# Altium PCB adio.PCBDOC (part 1 of 3)
Units mil, origin at the board's own origin, x right, y up, seen from the top; angles counter-clockwise.
Board outline 7750 x 4500 mil, 6 copper layers (Top Layer, Internal Plane 1, Mid-Layer 1, Mid-Layer 2, Internal Plane 2, Bottom Layer); 163 components, 231 nets, 1195 pads, 503 vias.
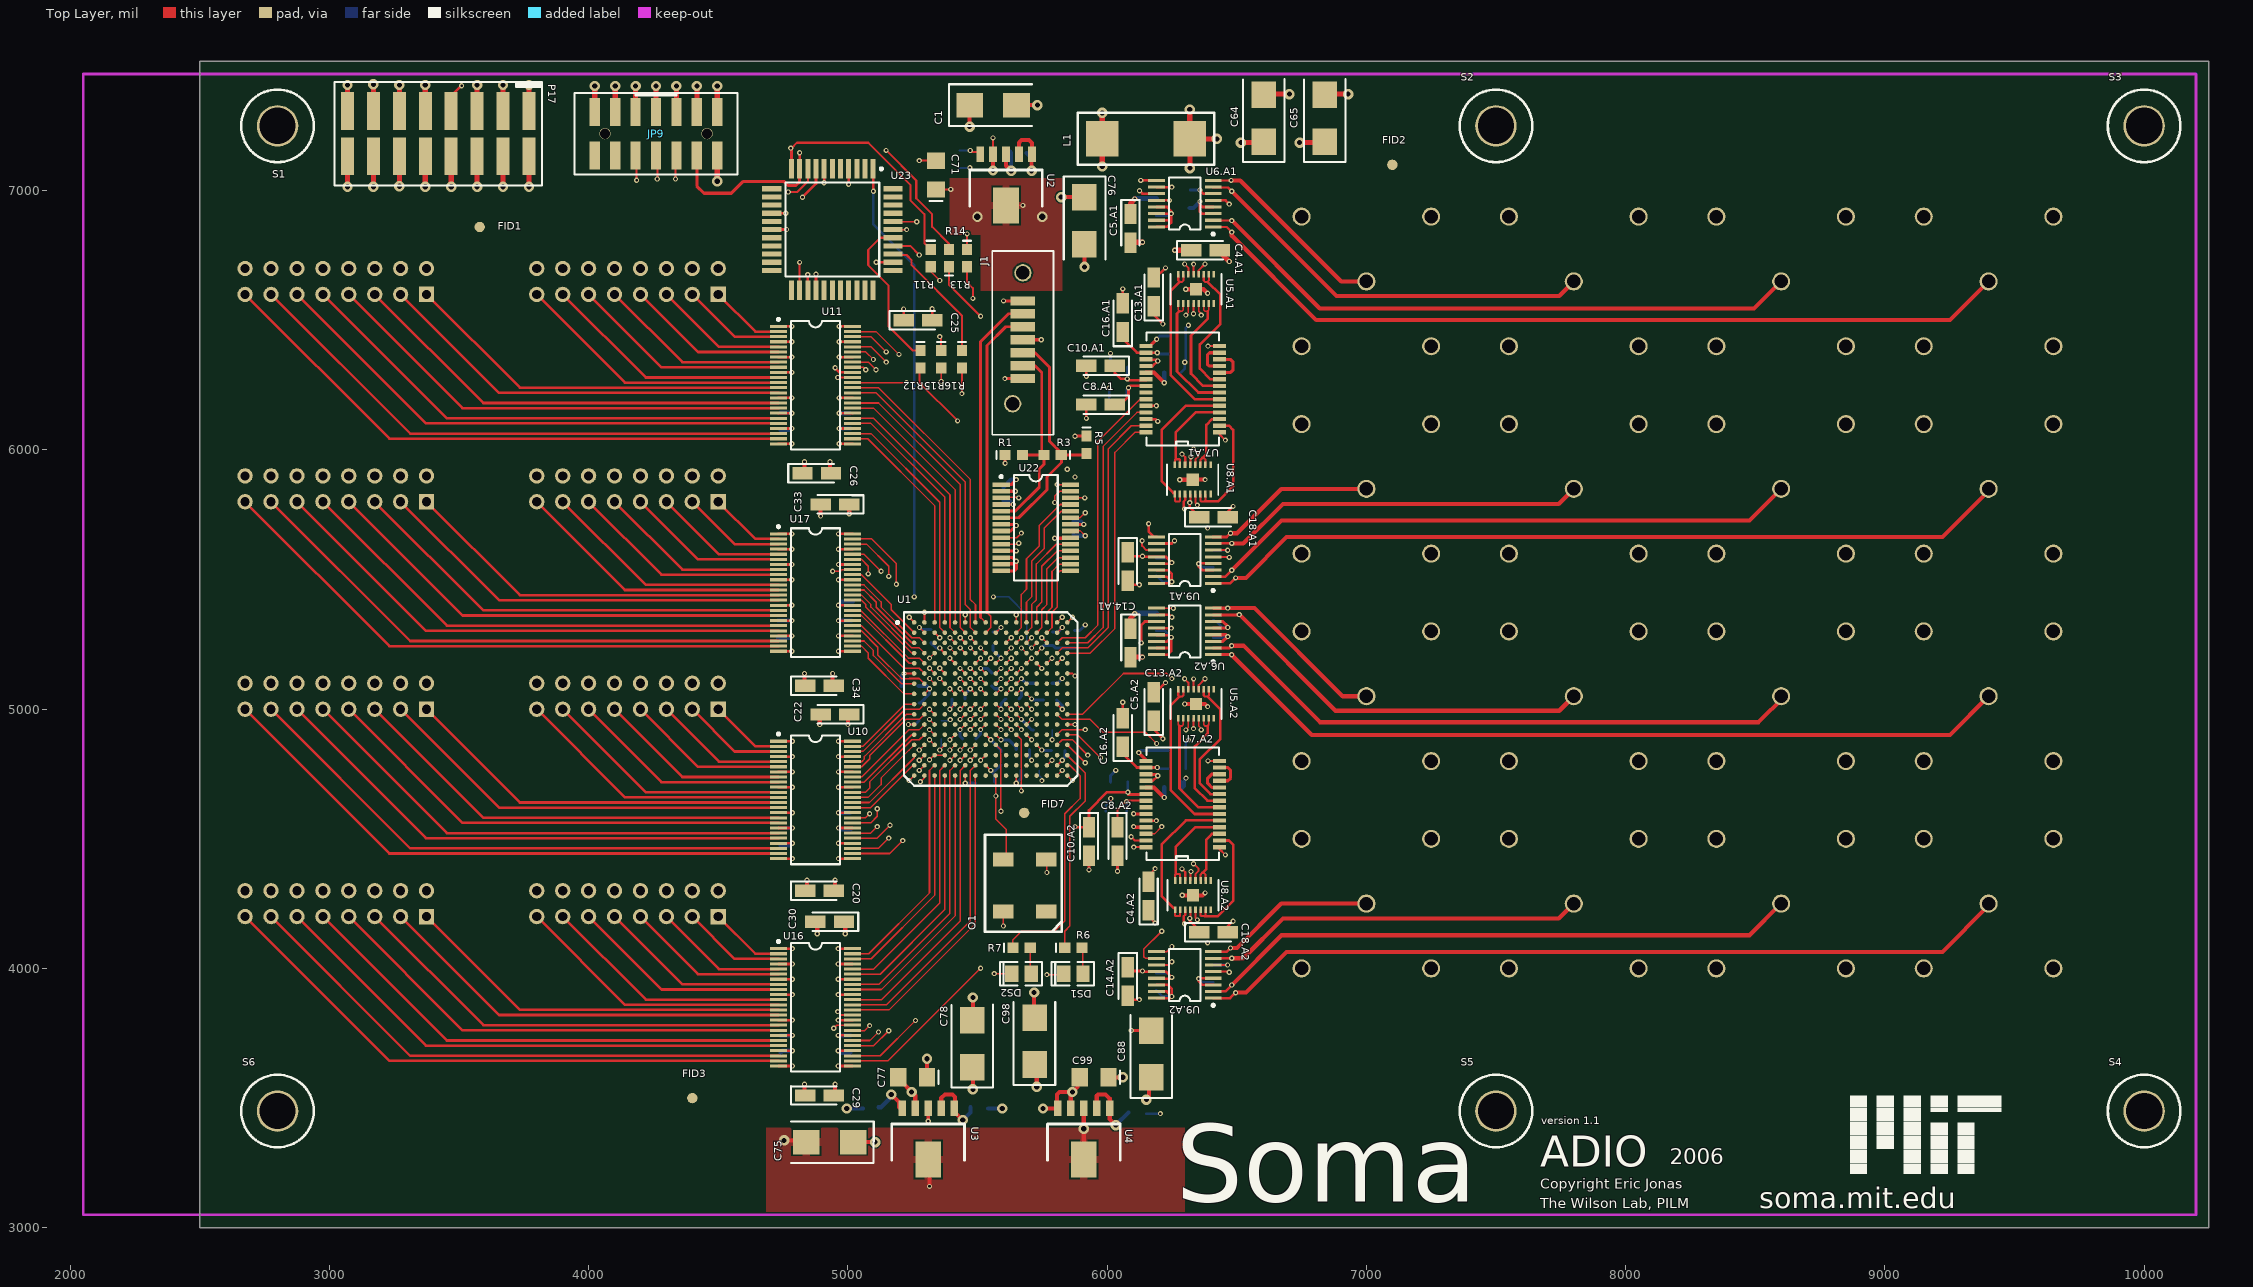
[diagram p0: Top Layer view]
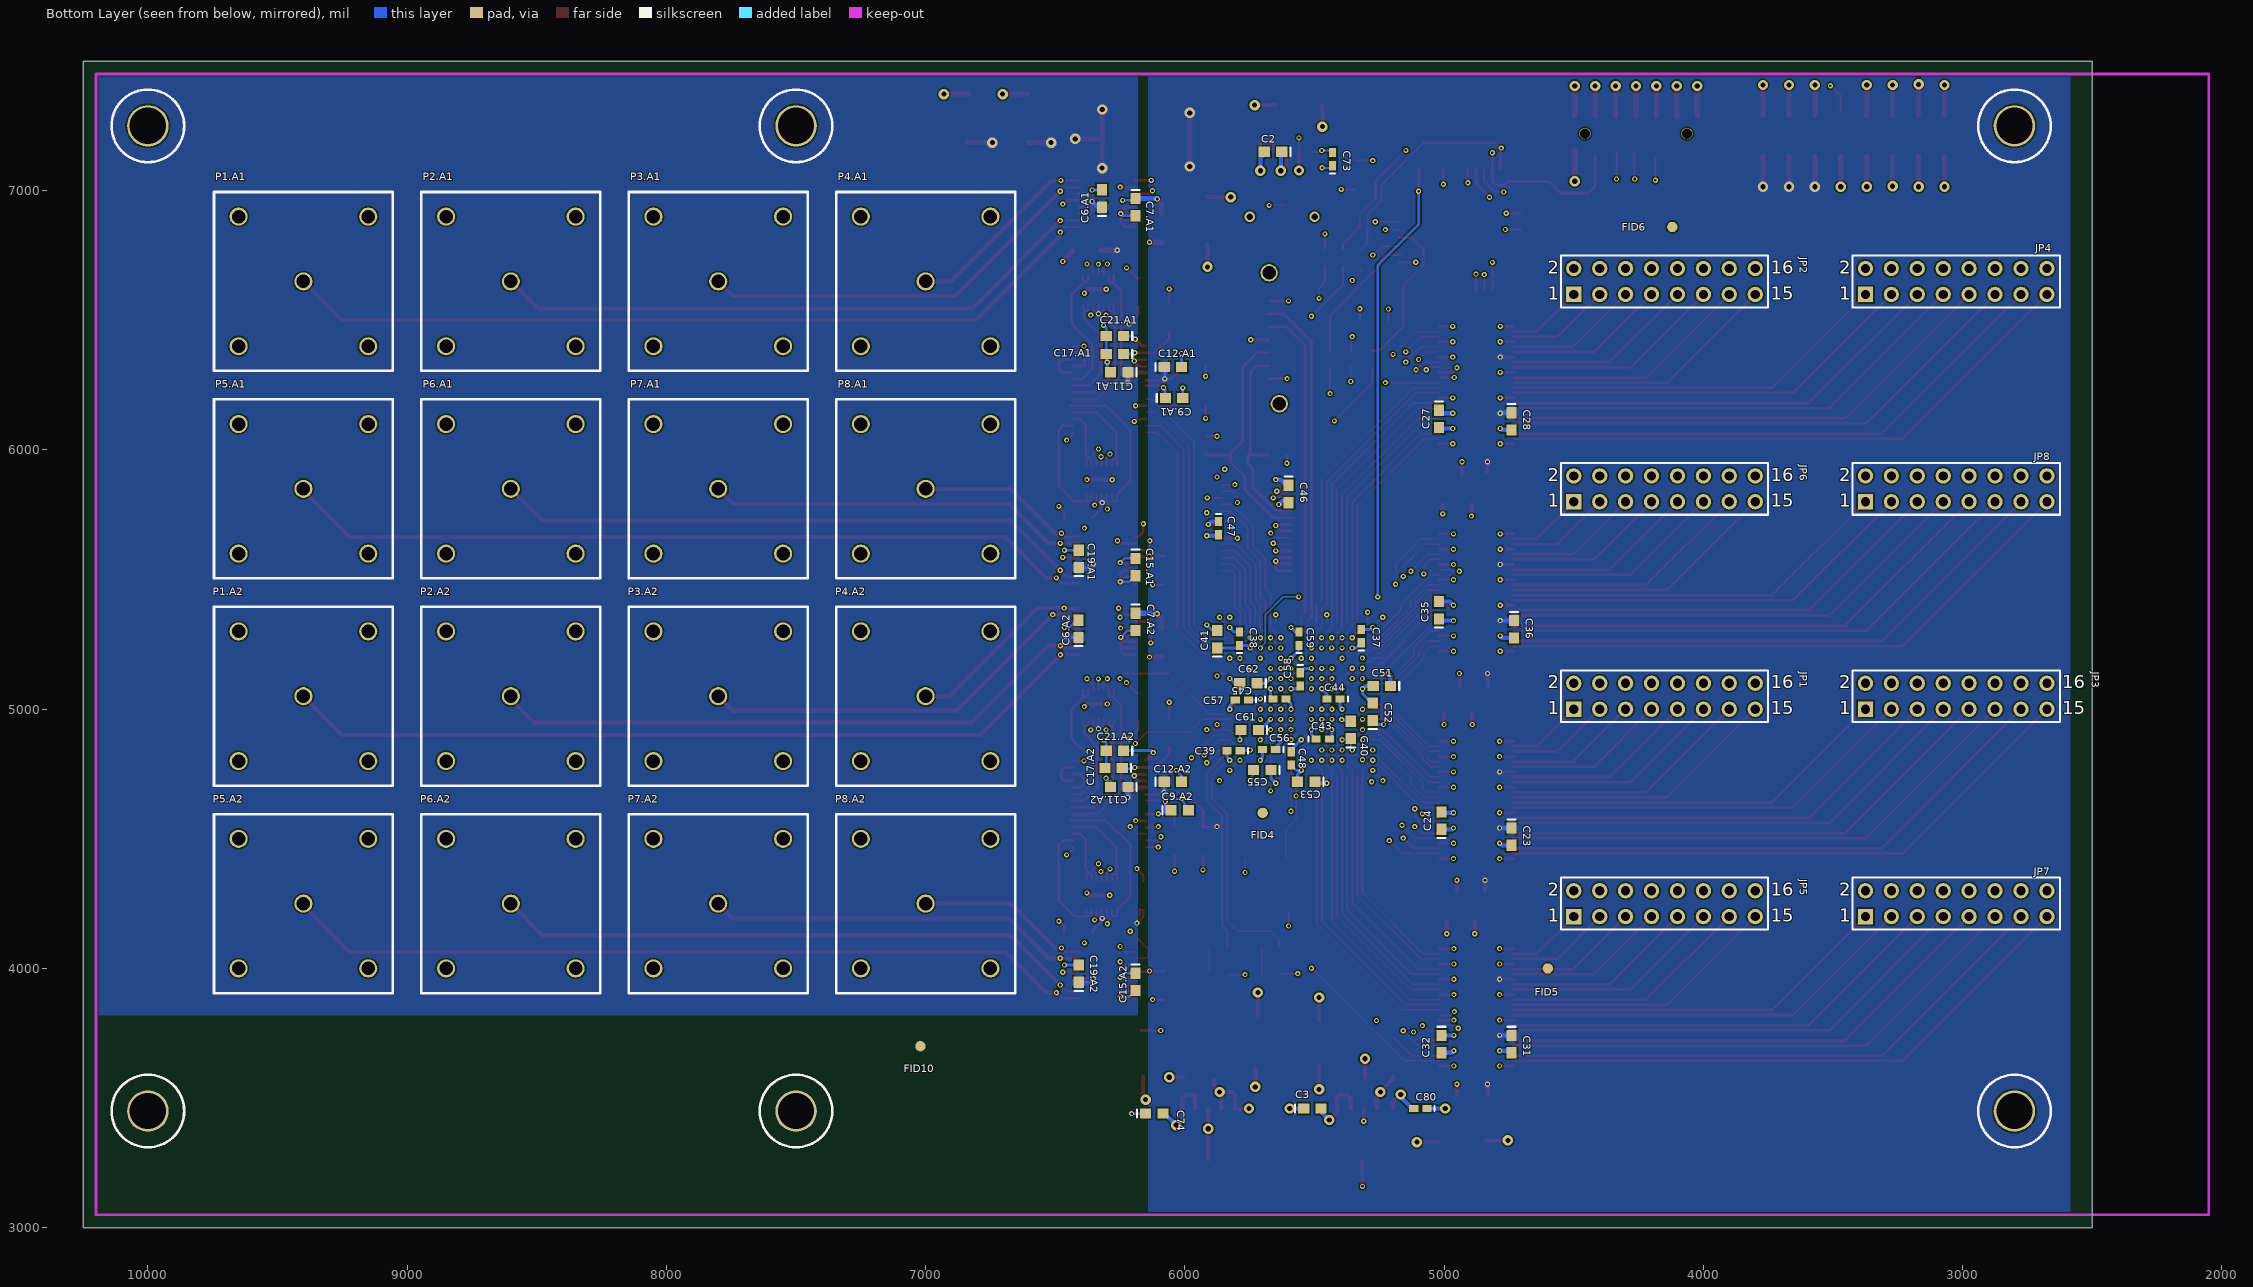
[diagram p1: Bottom Layer view, seen from below]
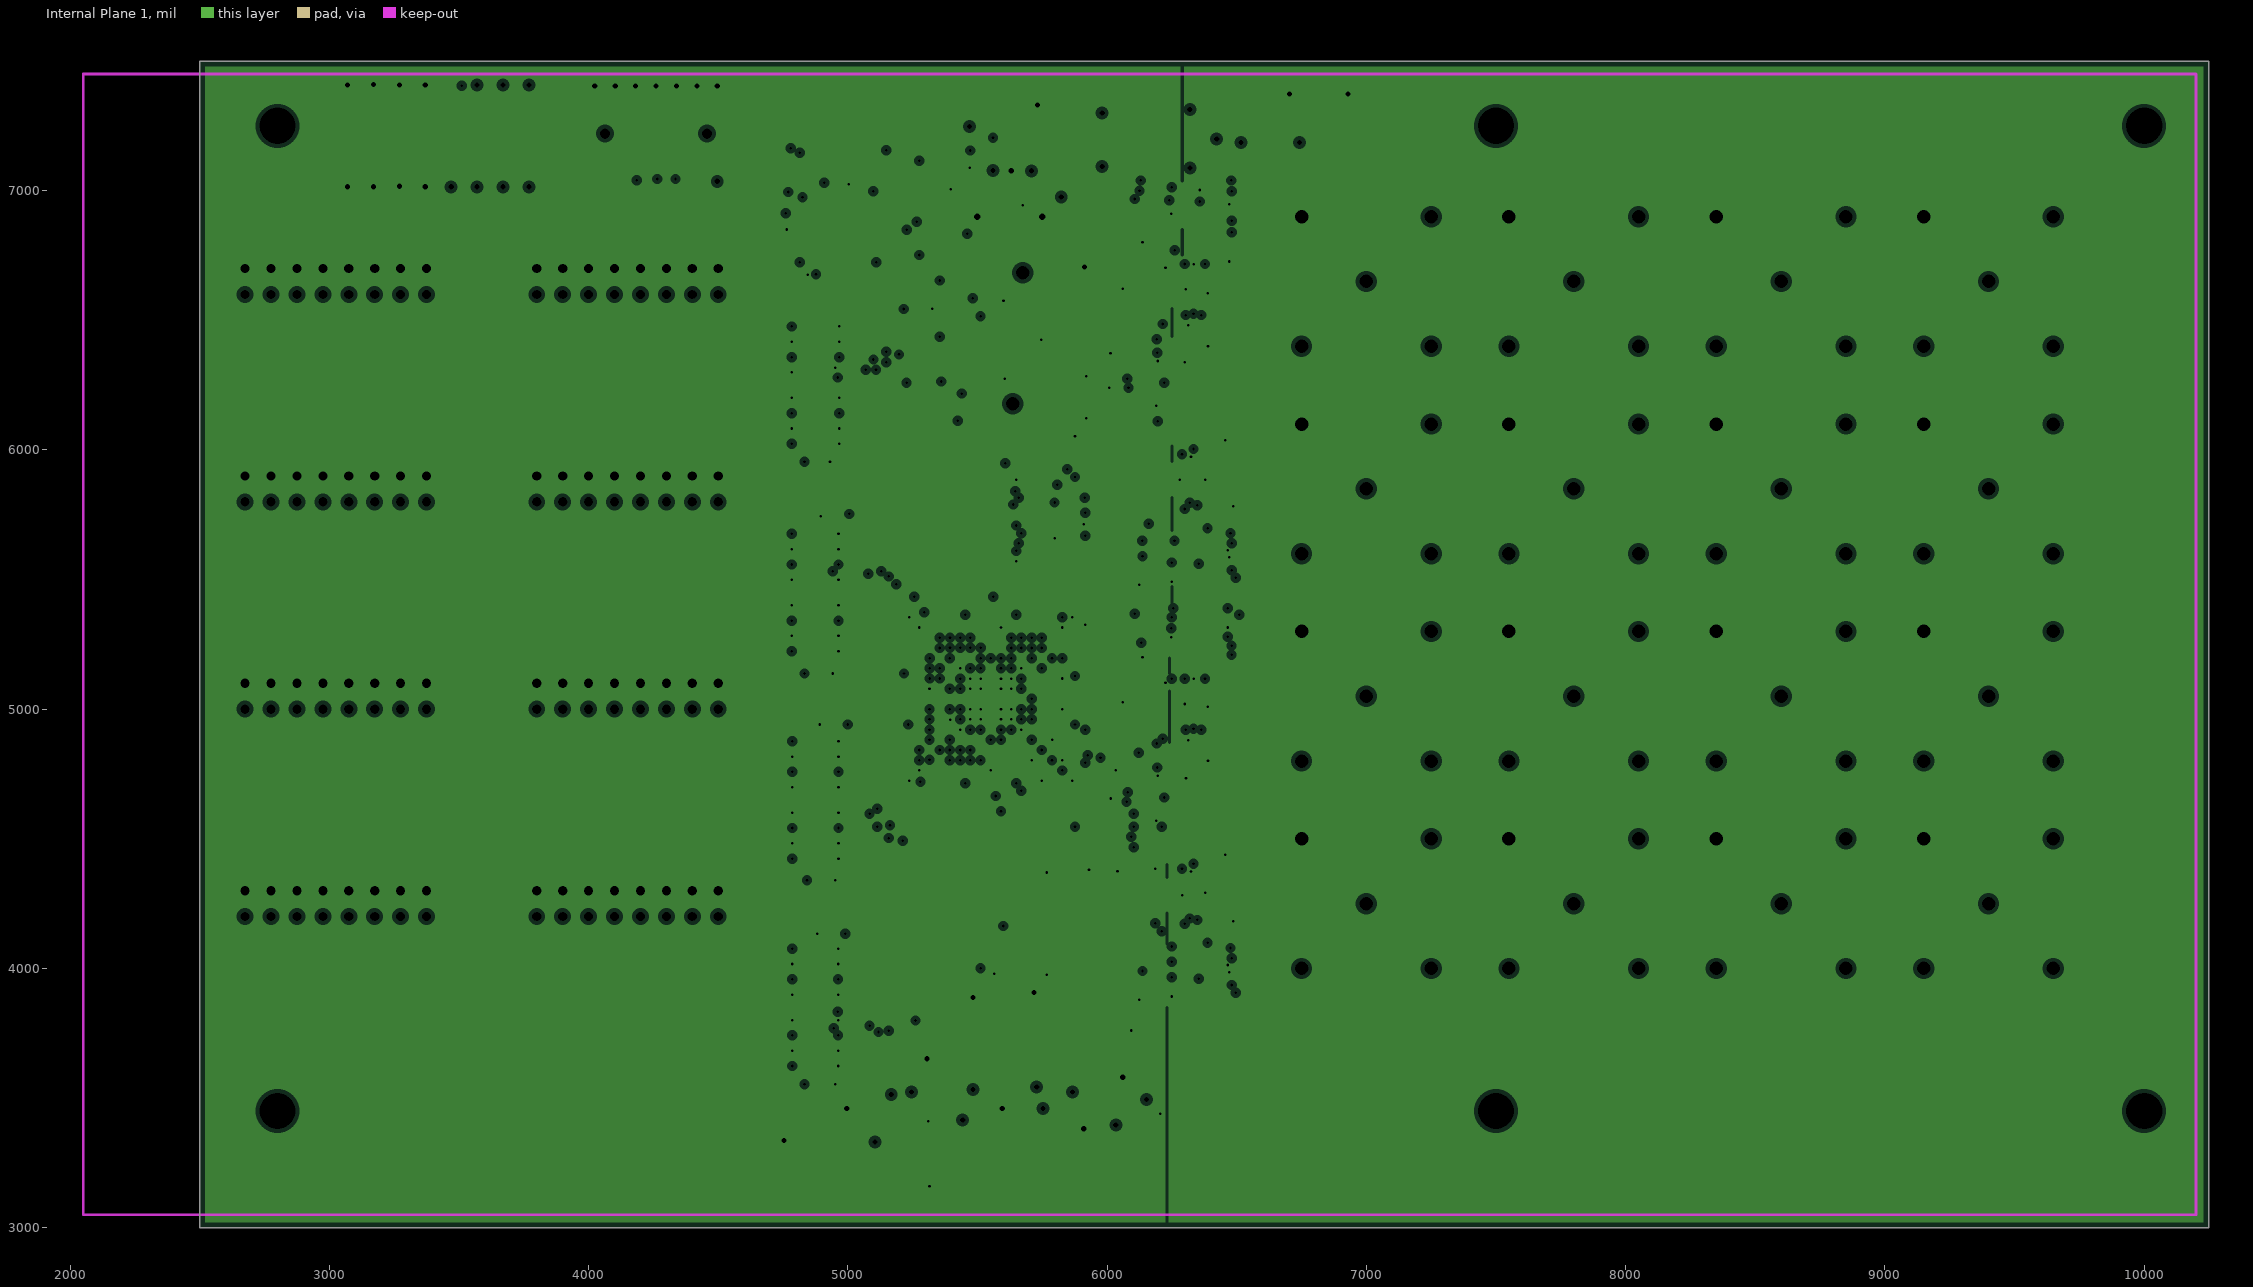
[diagram p2: Internal Plane 1, clearances drawn from the general rule]
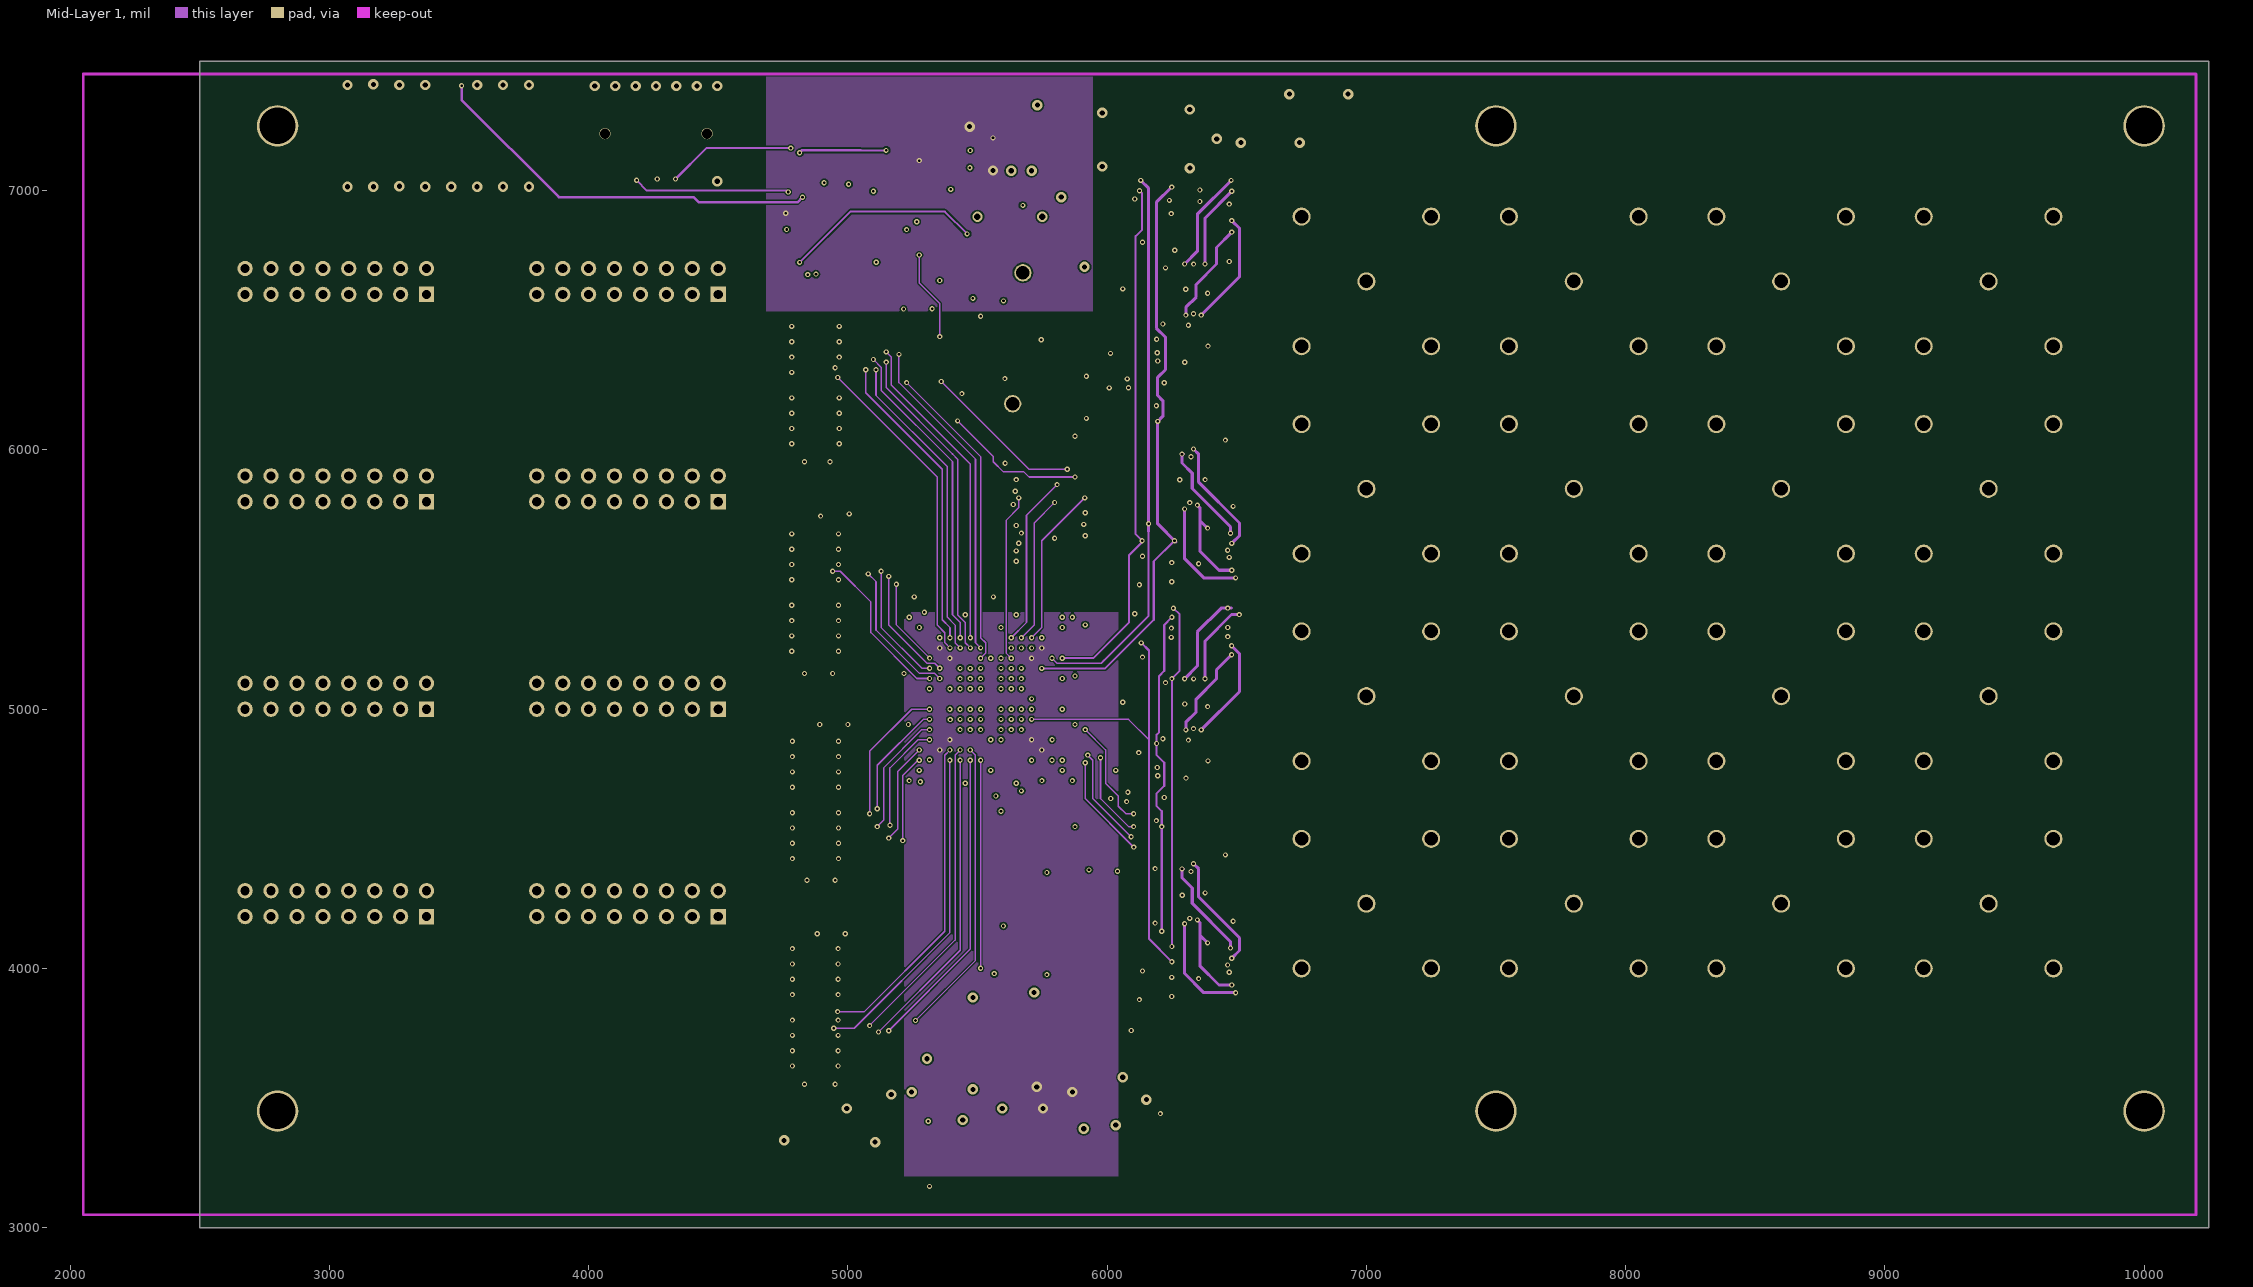
[diagram p3: Mid-Layer 1]
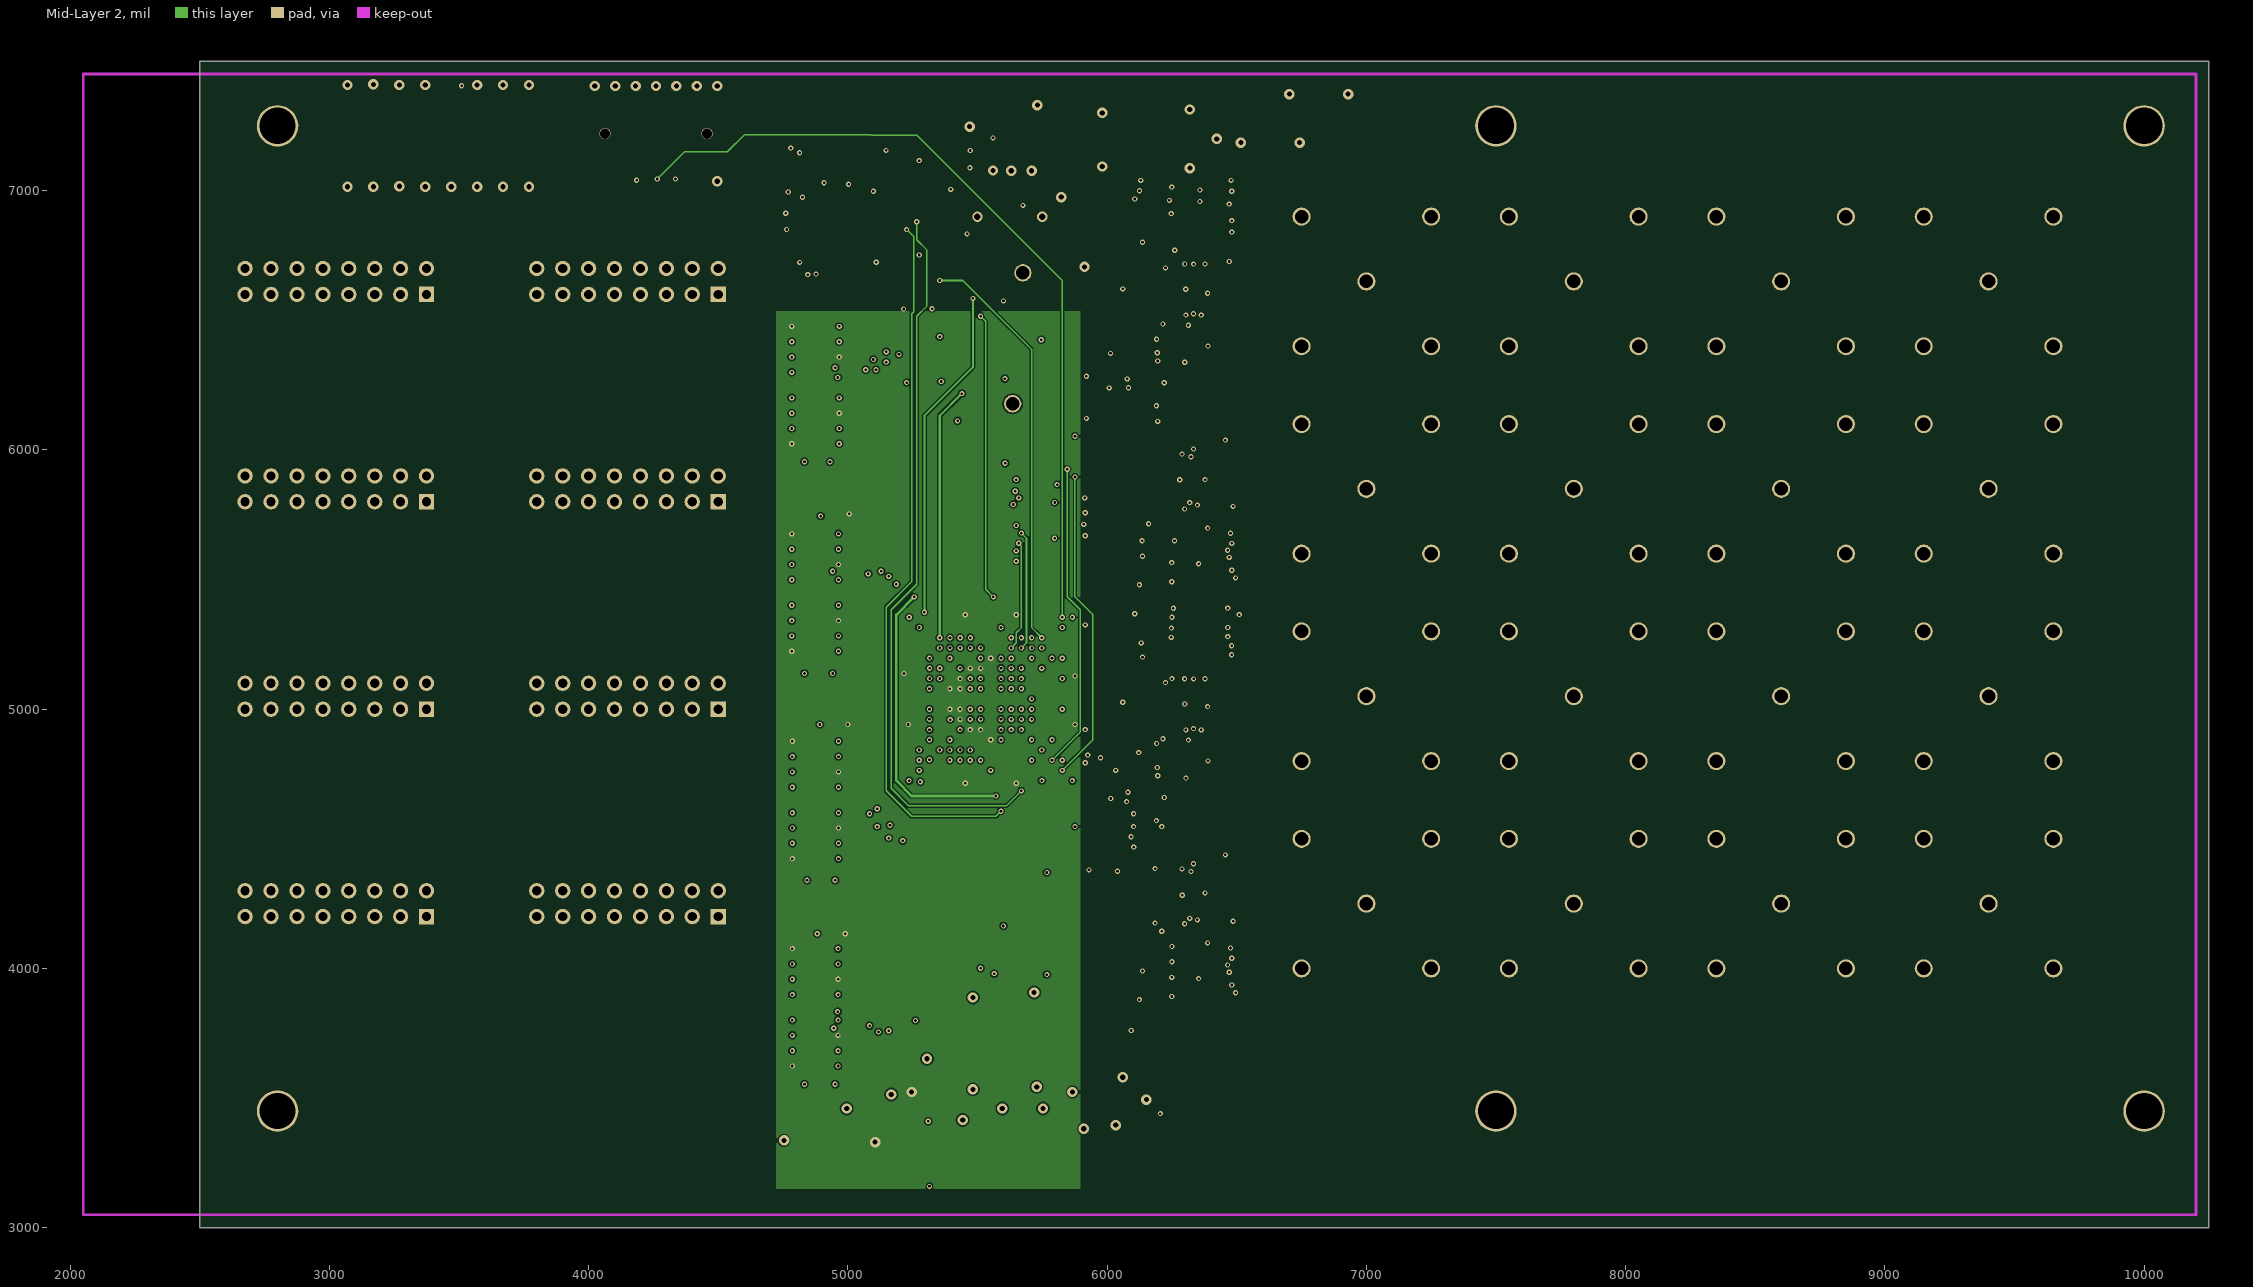
[diagram p4: Mid-Layer 2]
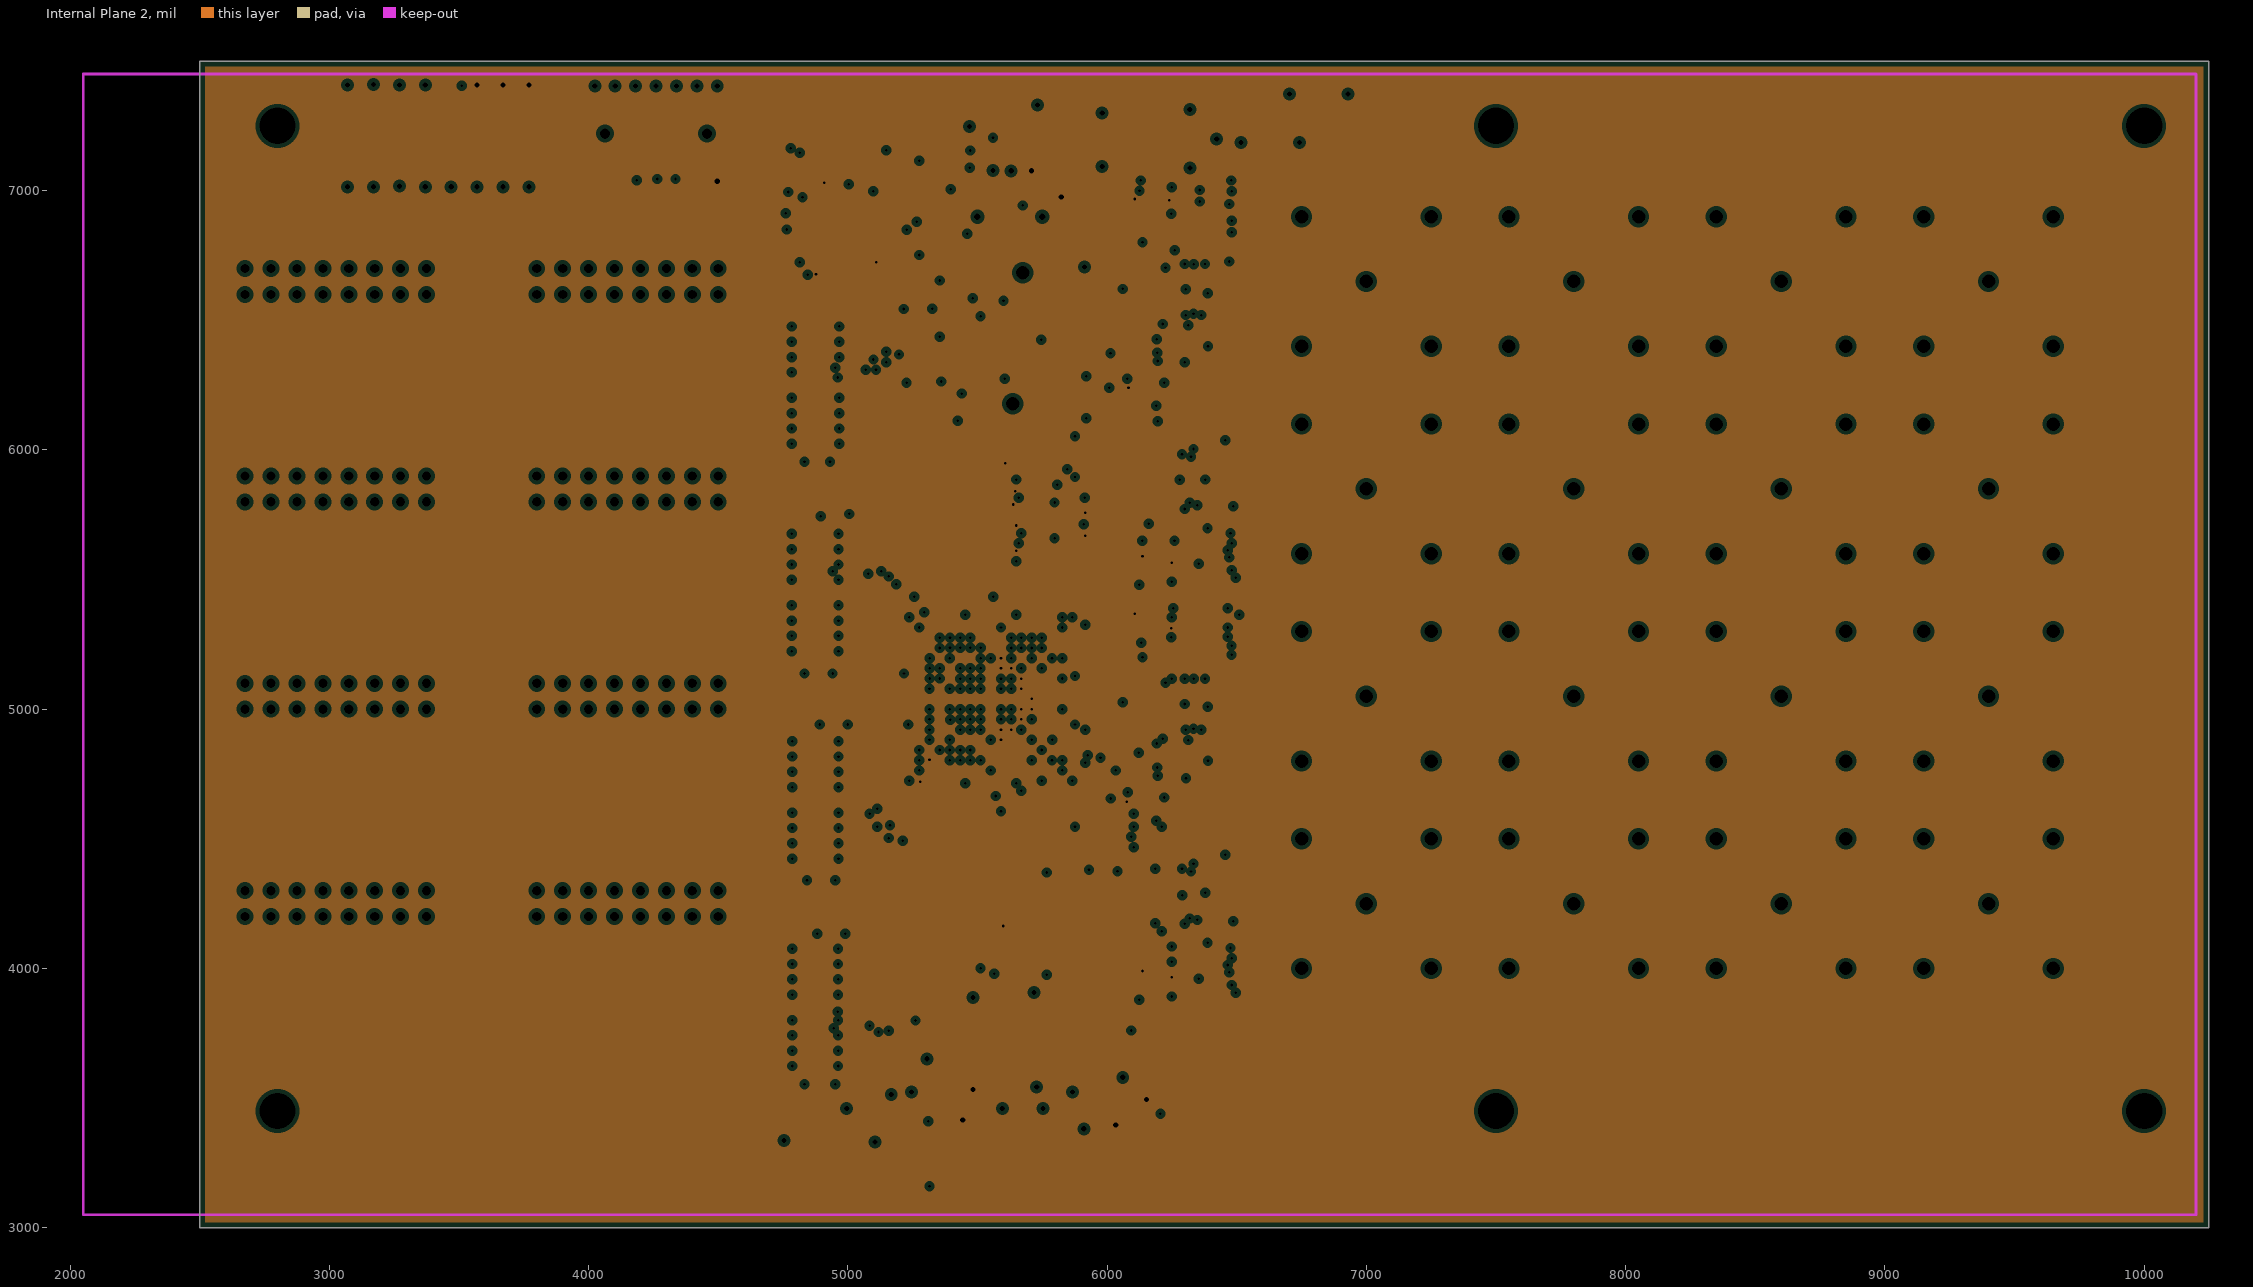
[diagram p5: Internal Plane 2, clearances drawn from the general rule]

## Layer stack, top to bottom
Top Layer: signal copper 1.4
Dielectric: core 12.6, FR-4, Dk 4.8
Internal Plane 1: plane copper 1.4, net GND
Dielectric: prepreg 12.6, FR-4, Dk 4.8
Mid-Layer 1: signal copper 1.4
Dielectric: core 12.6, FR-4, Dk 4.8
Mid-Layer 2: signal copper 1.4
Dielectric: prepreg 12.6, FR-4, Dk 4.8
Internal Plane 2: plane copper 1.4, net VCC
Dielectric: core 12.6, FR-4, Dk 4.8
Bottom Layer: signal copper 1.4

## Board outline
2500,3000 10250,3000 10250,7500 2500,7500

## Design rules (kind name [scope] priority, off if disabled: settings)
Clearance [All] p1: gap=6
ComponentClearance [All] p1: gap=10 collisioncheckmode=3 verticalgap=10
HoleSize [All] p1: absolutevalues=TRUE maxlimit=200 minlimit=1 maxpercent=80.000 minpercent=20.000
PlaneClearance [All] p1: clearance=15
PlaneConnect [All] p1: planeconnectstyle=Relief reliefexpansion=10 reliefentries=4 reliefconductorwidth=10 reliefairgap=7
PolygonConnect [All] p1: connectstyle=Relief reliefconductorwidth=30 reliefentries=4 polygonreliefangle="90 Angle"
RoomDefinition A2 [InComponentClass('A2')] p1: confinementstyle=ConfineIn formatcopy=TRUE lockcomponents=FALSE outline 5870.75,3850 10200,3850 10200,5450 5870.75,5450
RoomDefinition SIO [InComponentClass('SIO')] p2: confinementstyle=ConfineIn formatcopy=TRUE lockcomponents=FALSE outline 0,0 2000,0 2000,1000 0,1000
RoomDefinition P [InComponentClass('P')] p3: confinementstyle=ConfineIn formatcopy=TRUE lockcomponents=FALSE outline 0,0 2000,0 2000,1000 0,1000
RoomDefinition F [InComponentClass('F')] p4: confinementstyle=ConfineIn formatcopy=TRUE lockcomponents=FALSE outline 6230,6900 5200,6900 5200,4675 6230,4675
RoomDefinition DIO [InComponentClass('DIO')] p5: confinementstyle=ConfineIn formatcopy=TRUE lockcomponents=FALSE outline 0,0 2000,0 2000,1000 0,1000
RoomDefinition A1 [InComponentClass('A1')] p6: confinementstyle=ConfineIn formatcopy=TRUE lockcomponents=FALSE outline 5870.75,5475 10200,5475 10200,7075 5870.75,7075
RoutingVias [All] p1: holewidth=10 width=40 viastyle="Through Hole" minholewidth=10 minwidth=20 maxholewidth=28 maxwidth=50
SolderMaskExpansion [All] p1: expansion=4
TestPointUsage [All] p1: valid=0 allowmultiple=FALSE
Testpoint [All] p1: side=15 testpointundercomponent=TRUE minsize=40 maxsize=100 preferedsize=60 minholesize=0 maxholesize=40 preferedholesize=32 testpointgrid=1 style=1023 order=0-112345678
Width [All] p1: maxlimit=200 minlimit=6 preferedwidth=8 midlayer1_prefwidth=10 midlayer2_prefwidth=6 bottomlayer_prefwidth=12 minimp=50.000000 maximp=50.000000 favimp=50.000000
14 further rules are at their usual default settings.

## Classes and differential pairs
component class DIO: C20 C22 C23 C24 C25 C26 C27 C28 C29 C30 C31 C32 C33 C34 C35 C36 JP1 JP2 JP3 JP4 JP5 JP6 JP7 JP8 U10 U11 U16 U17
component class SIO: C46 C47 J1 R1 R3 R5 U22
component class P: C1 C2 C3 C37 C38 C39 C40 C41 C43 C44 C45 C48 C51 C52 C53 C55 C56 C57 C58 C59 C61 C62 C64 C65 C71 C73 C74 C75 C76 C77 C78 C80 C88 C98 C99 FID1 FID2 FID3 FID4 FID5 FID6 FID7 FID10 JP9 L1 O1 P17 R11 R12 R13 R14 R15 R16 S1 S2 S3 S4 S5 S6 S7 S8 S9 U1 U2 U3 U4 U23
component class F: DS1 DS2 R6 R7
channel class ADIO: A1 A2
component class A2: C4.A2 C5.A2 C6.A2 C7.A2 C8.A2 C9.A2 C10.A2 C11.A2 C12.A2 C13.A2 C14.A2 C15.A2 C16.A2 C17.A2 C18.A2 C19.A2 C21.A2 P1.A2 P2.A2 P3.A2 P4.A2 P5.A2 P6.A2 P7.A2 P8.A2 U5.A2 U6.A2 U7.A2 U8.A2 U9.A2
component class A1: C4.A1 C5.A1 C6.A1 C7.A1 C8.A1 C9.A1 C10.A1 C11.A1 C12.A1 C13.A1 C14.A1 C15.A1 C16.A1 C17.A1 C18.A1 C19.A1 C21.A1 P1.A1 P2.A1 P3.A1 P4.A1 P5.A1 P6.A1 P7.A1 P8.A1 U5.A1 U6.A1 U7.A1 U8.A1 U9.A1

## Components (designator, comment, footprint, x,y, rotation, side; value= is the part's Value field where it differs from the comment)
C1 "POLCAP2" 6032 5560,7330 r0 top
C2 "CAPACITOR" 0603 5660,7150 r0 bottom
C3 "CAPACITOR" 0603 5508.25,3460 r180 bottom
C4.A1 "POLCAP" 3216 6380,6770 r0 top (schematic designator C4)
C4.A2 "POLCAP" 3216 6160,4280 r90 top (schematic designator C4)
C5.A1 "POLCAP" 3216 6090,6854.88 r270 top (schematic designator C5)
C5.A2 "POLCAP" 3216 6090,5254.88 r270 top (schematic designator C5)
C6.A1 "CAPACITOR" 0603 6320,6970 r90 bottom (schematic designator C6)
C6.A2 "CAPACITOR" 0603 6410,5310 r90 bottom (schematic designator C6)
C7.A1 "CAPACITOR" 0603 6190,6936.54 r270 bottom (schematic designator C7)
C7.A2 "CAPACITOR" 0603 6190,5336.54 r270 bottom (schematic designator C7)
C8.A1 "POLCAP" 3216 5975,6175 r180 top (schematic designator C8)
C8.A2 "POLCAP" 3216 6040,4490 r270 top (schematic designator C8)
C9.A1 "CAPACITOR" 0603 6041.54,6200 r180 bottom (schematic designator C9)
C9.A2 "CAPACITOR" 0603 6020,4610 r180 bottom (schematic designator C9)
C10.A1 "POLCAP" 3216 5975,6325 r180 top (schematic designator C10)
C10.A2 "POLCAP" 3216 5930,4490 r270 top (schematic designator C10)
C11.A1 "CAPACITOR" 0603 6253.28,6300 r0 bottom (schematic designator C11)
C11.A2 "CAPACITOR" 0603 6253.28,4700 r0 bottom (schematic designator C11)
C12.A1 "CAPACITOR" 0603 6046.54,6320 r180 bottom (schematic designator C12)
C12.A2 "CAPACITOR" 0603 6046.54,4720 r180 bottom (schematic designator C12)
C13.A1 "POLCAP" 3216 6180,6610 r90 top (schematic designator C13)
C13.A2 "POLCAP" 3216 6180,5010 r90 top (schematic designator C13)
C14.A1 "POLCAP" 3216 6080,5550 r270 top (schematic designator C14)
C14.A2 "POLCAP" 3216 6080,3950 r270 top (schematic designator C14)
C15.A1 "CAPACITOR" 0603 6190,5548.25 r270 bottom (schematic designator C15)
C15.A2 "CAPACITOR" 0603 6190,3948.25 r270 bottom (schematic designator C15)
C16.A1 "POLCAP" 3216 6060,6510 r90 top (schematic designator C16)
C16.A2 "POLCAP" 3216 6060,4910 r90 top (schematic designator C16)
C17.A1 "CAPACITOR" 0603 6270,6370 r0 bottom (schematic designator C17)
C17.A2 "CAPACITOR" 0603 6275,4773 r0 bottom (schematic designator C17)
C18.A1 "POLCAP" 3216 6410,5740 r0 top (schematic designator C18)
C18.A2 "POLCAP" 3216 6410,4140 r0 top (schematic designator C18)
C19.A1 "CAPACITOR" 0603 6409.25,5579.92 r90 bottom (schematic designator C19)
C19.A2 "CAPACITOR" 0603 6409.25,3979.92 r90 bottom (schematic designator C19)
C20 "POLCAP" 3216 4890,4300 r0 top
C21.A1 "CAPACITOR" 0603 6270,6440 r0 bottom (schematic designator C21)
C21.A2 "CAPACITOR" 0603 6270,4840 r0 bottom (schematic designator C21)
C22 "POLCAP" 3216 4950,4980 r180 top
C23 "CAPACITOR" 0603 4740,4508.25 r270 bottom
C24 "CAPACITOR" 0603 5010,4570 r90 bottom
C25 "POLCAP" 3216 5270,6500 r0 top
C26 "POLCAP" 3216 4880,5910 r0 top
C27 "CAPACITOR" 0603 5020,6120 r270 bottom
C28 "CAPACITOR" 0603 4740,6110 r270 bottom
C29 "POLCAP" 3216 4890,3510 r0 top
C30 "POLCAP" 3216 4930,4180 r180 top
C31 "CAPACITOR" 0603 4740,3708.25 r270 bottom
C32 "CAPACITOR" 0603 5010,3708.25 r270 bottom
C33 "POLCAP" 3216 4950,5790 r180 top
C34 "POLCAP" 3216 4890,5090 r0 top
C35 "CAPACITOR" 0603 5020,5381.75 r90 bottom
C36 "CAPACITOR" 0603 4730,5308.25 r270 bottom
C37 "CAPACITOR" 0402 5320,5281.75 r90 bottom
C38 "CAPACITOR" 0402 5790,5271.75 r90 bottom
C39 "CAPACITOR" 0402 5811.75,4840 r0 bottom
C40 "CAPACITOR" 0603 5360,4920 r90 bottom
C41 "CAPACITOR" 0603 5875,5270 r90 bottom
C43 "CAPACITOR" 0402 5468.25,4885 r180 bottom
C44 "CAPACITOR" 0402 5426.75,5040 r0 bottom
C45 "CAPACITOR" 0402 5555,5115 r270 bottom
C46 "CAPACITOR" 0603 5600,5830 r270 bottom
C47 "CAPACITOR" 0402 5870,5698.25 r270 bottom
C48 "CAPACITOR" 0402 5590,4810 r270 bottom
C51 "CAPACITOR" 0603 5240,5090 r0 bottom
C52 "CAPACITOR" 0603 5275,4990 r90 bottom
C53 "CAPACITOR" 0603 5531.75,4720 r0 bottom
C55 "CAPACITOR" 0603 5701.75,4765 r0 bottom
C56 "CAPACITOR" 0402 5675,4845 r0 bottom
C57 "CAPACITOR" 0402 5780,5035 r0 bottom
C58 "CAPACITOR" 0402 5635,5040 r180 bottom
C59 "CAPACITOR" 0402 5560,5271.75 r90 bottom
C61 "CAPACITOR" 0603 5750,4920 r0 bottom
C62 "CAPACITOR" 0603 5755,5100 r0 bottom
C64 "POLCAP2" 6032 6605,7280 r90 top
C65 "POLCAP2" 6032 6840,7280 r90 top
C71 "Cap" 1206 5340,7060 r90 top
C73 "CAPACITOR" 0402 5430,7121.75 r90 bottom
C74 "CAPACITOR" 0603 6118.25,3440 r180 bottom
C75 "POLCAP2" 6032 4930,3330 r180 top
C76 "POLCAP2" 6032 5912.61,6884.8 r270 top
C77 "Cap" 1206 5250,3580 r180 top
C78 "POLCAP2" 6032 5480,3710 r90 top
C80 "CAPACITOR" 0402 5091.75,3460 r0 bottom
C88 "POLCAP2" 6032 6170,3670 r90 top
C98 "POLCAP2" 6032 5720,3720 r90 top
C99 "Cap" 1206 5950,3580 r180 top
DS1 "LED3" "SMD _LED" 5870,3980 r0 top
DS2 "LED3" "SMD _LED" 5670,3980 r0 top
FID1 "FIDUCIAL" FIDUCIAL 3580,6860 r90 top
FID2 "FIDUCIAL" FIDUCIAL 7100,7100 r90 top
FID3 "FIDUCIAL" FIDUCIAL 4400,3500 r90 top
FID4 "FIDUCIAL" FIDUCIAL 5700,4600 r270 bottom
FID5 "FIDUCIAL" FIDUCIAL 4600,4000 r270 bottom
FID6 "FIDUCIAL" FIDUCIAL 4120,6860 r270 bottom
FID7 "FIDUCIAL" FIDUCIAL 5680,4600 r90 top
FID10 "FIDUCIAL" FIDUCIAL 7020,3700 r270 bottom
J1 "SATA 7-pin header" "MOLES 67800-5005" 5675,6275 r270 top
JP1 "Header 8X2" HDR2X8 4500,5000 r180 bottom
JP2 "Header 8X2" HDR2X8 4500,6600 r180 bottom
JP3 "Header 8X2" HDR2X8 3375,5000 r180 bottom
JP4 "Header 8X2" HDR2X8 3375,6600 r180 bottom
JP5 "Header 8X2" HDR2X8 4500,4200 r180 bottom
JP6 "Header 8X2" HDR2X8 4500,5800 r180 bottom
JP7 "Header 8X2" HDR2X8 3375,4200 r180 bottom
JP8 "Header 8X2" HDR2X8 3375,5800 r180 bottom
JP9 "Header 7X2" "SMT 2x7 2mm HDR" 4260,7220 r0 top
L1 "Inductor 28F0121-1SR" STEWARD_1SR 6150,7200 r0 top
O1 "OSC2" ECS-3953M 5765.35,4220 r90 top
P1.A1 "BNC" "Vertical BNC 227699-1" 9400,6650 r180 bottom (schematic designator P1)
P1.A2 "BNC" "Vertical BNC 227699-1" 9400,5050 r180 bottom (schematic designator P1)
P2.A1 "BNC" "Vertical BNC 227699-1" 8600,6650 r180 bottom (schematic designator P2)
P2.A2 "BNC" "Vertical BNC 227699-1" 8600,5050 r180 bottom (schematic designator P2)
P3.A1 "BNC" "Vertical BNC 227699-1" 7800,6650 r180 bottom (schematic designator P3)
P3.A2 "BNC" "Vertical BNC 227699-1" 7800,5050 r180 bottom (schematic designator P3)
P4.A1 "BNC" "Vertical BNC 227699-1" 7000,6650 r180 bottom (schematic designator P4)
P4.A2 "BNC" "Vertical BNC 227699-1" 7000,5050 r180 bottom (schematic designator P4)
P5.A1 "BNC" "Vertical BNC 227699-1" 9400,5850 r180 bottom (schematic designator P5)
P5.A2 "BNC" "Vertical BNC 227699-1" 9400,4250 r180 bottom (schematic designator P5)
P6.A1 "BNC" "Vertical BNC 227699-1" 8600,5850 r180 bottom (schematic designator P6)
P6.A2 "BNC" "Vertical BNC 227699-1" 8600,4250 r180 bottom (schematic designator P6)
P7.A1 "BNC" "Vertical BNC 227699-1" 7800,5850 r180 bottom (schematic designator P7)
P7.A2 "BNC" "Vertical BNC 227699-1" 7800,4250 r180 bottom (schematic designator P7)
P8.A1 "BNC" "Vertical BNC 227699-1" 7000,5850 r180 bottom (schematic designator P8)
P8.A2 "BNC" "Vertical BNC 227699-1" 7000,4250 r180 bottom (schematic designator P8)
P17 "Header 8X2" "MOLEX 15-91-2160" 3420,7220 r0 top
R1 "100" 0603 5640,5980 r0 top
R3 "100" 0603 5790,5980 r180 top
R5 "100" 0603 5920,6020 r270 top
R6 "current-limiting series res" CC1608-0603 5870,4080 r0 top
R7 "current-limiting series res" CC1608-0603 5670,4080 r0 top
R11 "current-limiting series res" 0603 5320,6740 r270 top
R12 "current-limiting series res" 0603 5280,6350 r270 top
R13 "current-limiting series res" 0603 5460,6740 r270 top
R14 "current-limiting series res" 0603 5390,6740 r90 top
R15 "current-limiting series res" 0603 5360,6350 r270 top
R16 "current-limiting series res" 0603 5440,6350 r270 top
S1 "6-32 Mounting Screw" SCREW6-32 2800,7250 r0 top
S2 "6-32 Mounting Screw" SCREW6-32 7500,7250 r0 top
S3 "6-32 Mounting Screw" SCREW6-32 10000,7250 r0 top
S4 "6-32 Mounting Screw" SCREW6-32 10000,3450 r0 top
S5 "6-32 Mounting Screw" SCREW6-32 7500,3450 r0 top
S6 "6-32 Mounting Screw" SCREW6-32 2800,3450 r0 top
U1 "Xilinx XC3S200-FT256" "Xilinx FT256 BGA" 5551.18,5039.37 r0 top locked
U2 "TPS79518" SOT223-5/Simple 5610.24,7140 r180 top
U3 "TPS79525" SOT223-5/Simple 5310,3460 r180 top
U4 "TPS79501" SOT223-5/Simple 5910,3460 r180 top
U5.A1 "LTC6242" LTCDHC-16 6343.17,6620 r0 top (schematic designator U5)
U5.A2 "LTC6242" LTCDHC-16 6343.17,5020 r0 top (schematic designator U5)
U6.A1 "DAC8554" TSSO5x6-G16 6300,6950 r90 top (schematic designator U6)
U6.A2 "DAC8554" TSSO5x6-G16 6300,5300 r90 top (schematic designator U6)
U7.A1 "LTC1857/8/9" LTI_G_TSSOP 6291.73,6067.91 r90 top (schematic designator U7)
U7.A2 "LTC1857/8/9" LTI_G_TSSOP 6291.73,4467.91 r90 top (schematic designator U7)
U8.A1 "LTC6242" LTCDHC-16 6330,5885 r0 top (schematic designator U8)
U8.A2 "LTC6242" LTCDHC-16 6331,4282 r0 top (schematic designator U8)
U9.A1 "DAC8554" TSSO5x6-G16 6300,5575 r90 top (schematic designator U9)
U9.A2 "DAC8554" TSSO5x6-G16 6300,3975 r90 top (schematic designator U9)
U10 "SN74LVCH16245ADGGR" TSSO12x8-G48/X.3 4875,4650 r270 top
U11 "SN74LVCH16245ADGGR" TSSO12x8-G48/X.3 4875,6250 r270 top locked
U16 "SN74LVCH16245ADGGR" TSSO12x8-G48/X.3 4875,3850 r270 top locked
U17 "SN74LVCH16245ADGGR" TSSO12x8-G48/X.3 4875,5450 r270 top
U22 "DS92LV1224" SSO-G28/E4.3 5725,5700 r270 top locked
U23 "Xilinx CoolRunner-II XC2C64A" QFP10x10-G44/G10N 4940,6850 r270 top

## Footprints (in the part's own frame and the unit in brackets; to place one, negate y for a bottom-side part, rotate by r counter-clockwise, add the part's x,y. Pads: shape width x height; smd on the part's side, far side on the other; paste and mask are expansions set on the pad)
0402 [mm] "Standard-sized 0402 Passive"
  rect 0.9x0.7 smd: 1(-0.65,0) 2(0.65,0)
  silkscreen extent -1.4,-0.25 -1.4,0.25
0603 [mm] "Standard-sized 0603 Passive"
  rect 1.1x1 smd: 1(-0.85,0) 2(0.85,0)
  silkscreen extent -1.7,-0.4 -1.7,0.4
1206 [mm] "Standard-sized 1206 Passive"
  rect 1.6x1.8 smd: 1(-1.4,0) 2(1.4,0)
  silkscreen extent -2.53,-0.65 -2.53,0.65
3216 [mm] "Standard-Sized 3216 Polarized Leadless Cap"
  rect 2x1.2 smd: 1(-1.4,0) 2(1.4,0)
  silkscreen extent -2.79,-0.9 1.7,0.9
6032 [mm] "Standard-Sized 7343 Polarized Leadless Cap"
  rect 2.6x2.4 smd: 1(-2.3,0) 2(2.3,0)
  silkscreen extent -4.32,-2.03 3.81,2.05
CC1608-0603 [mm] "Chip Capacitor; Body 1.6 x 0.8 mm (LxW typ)"
  rect 1.1x1 smd: 1(-0.85,0) 2(0.85,0)
  silkscreen extent -1.7,-0.4 -1.7,0.4
ECS-3953M [mm] "ECS SMD CLOCK OSCILLATOR"
  rect 1.4x2 smd: 1(0,0) 2(5.08,0) 3(5.08,4.2) 4(0,4.2)
  silkscreen extent -2,-1.5 7.5,6
FIDUCIAL [mil] "Fiducial footprint as recommended by PCBpro"
  round 40 smd paste-20 mask+30: 0(0,0)
HDR2X8 [mm] "Connector; Header; 8x2 Position"
  rect 1.5x1.5 hole 0.9: 1(0,0)
  round 1.5 hole 0.9: 2(0,2.54) 3(2.54,0) 4(2.54,2.54) 5(5.08,0) 6(5.08,2.54) 7(7.62,0) 8(7.62,2.54) 9(10.16,0) 10(10.16,2.54) 11(12.7,0) 12(12.7,2.54) 13(15.24,0) 14(15.24,2.54) 15(17.78,0) 16(17.78,2.54)
  silkscreen extent -1.27,-1.27 19.05,3.81
LTCDHC-16 [mm] "16-lead plastic DFN from LTI"
  rect 0.25x0.65 smd: 1(-1.75,-1.397) 2(-1.25,-1.397) 3(-0.75,-1.397) 4(-0.25,-1.397) 5(0.25,-1.397) 6(0.75,-1.397) 7(1.25,-1.397) 8(1.75,-1.397) 9(1.75,1.453) 10(1.25,1.453) 11(0.75,1.453) 12(0.25,1.453) 13(-0.25,1.453) 14(-0.75,1.453) 15(-1.25,1.453) 16(-1.75,1.453)
  rect 1.2x1.2 smd: 13(0,0)
  silkscreen extent -2.5,-1.5 2.5,1.5
LTI_G_TSSOP [mm]
  rect 0.42x1.25 smd: 1(0,-3.6) 2(0.65,-3.6) 3(1.3,-3.6) 4(1.95,-3.6) 5(2.6,-3.6) 6(3.25,-3.6) 7(3.9,-3.6) 8(4.55,-3.6) 9(5.2,-3.6) 10(5.85,-3.6) 11(6.5,-3.6) 12(7.15,-3.6) 13(7.8,-3.6) 14(8.45,-3.6) 15(8.45,3.6) 16(7.8,3.6) 17(7.15,3.6) 18(6.5,3.6) 19(5.85,3.6) 20(5.2,3.6) 21(4.55,3.6) 22(3.9,3.6) 23(3.25,3.6) 24(2.6,3.6) 25(1.95,3.6) 26(1.3,3.6) 27(0.65,3.6) 28(0,3.6)
  silkscreen extent -1.27,-3.56 9.78,3.56
"MOLES 67800-5005" [mm] "SATA vertical PCB HEADER SMT"
  round 1.7 hole 1.35: 0(-10.37,0) 0(2.46,-1)
  rect 0.9x2.4 smd: 1(0,0) 2(-1.27,0) 3(-2.54,0) 4(-3.81,0) 5(-5.08,0) 6(-6.35,0) 7(-7.62,0)
  silkscreen extent -12.5,-3 5.5,3
"MOLEX 15-91-2160" [mm] "SMT 100-mil pitch 16 -pin dual-row header"
  rect 1.27x3.68 smd: 1(8.89,2.22) 2(8.89,-2.22) 3(6.35,2.22) 4(6.35,-2.22) 5(3.81,2.22) 6(3.81,-2.22) 7(1.27,2.22) 8(1.27,-2.22) 9(-1.27,2.22) 10(-1.27,-2.22) 11(-3.81,2.22) 12(-3.81,-2.22) 13(-6.35,2.22) 14(-6.35,-2.22) 15(-8.89,2.22) 16(-8.89,-2.22)
  silkscreen extent -10.16,-5.08 10.16,5.08
QFP10x10-G44/G10N [mm] "QFP, Metric; 44 Leads; Body 10 x 10 mm; Pitch 0.8 mm"
  rect 1.9x0.5 smd: 1(-5.95,4) 2(-5.95,3.2) 3(-5.95,2.4) 4(-5.95,1.6) 5(-5.95,0.8) 6(-5.95,0) 7(-5.95,-0.8) 8(-5.95,-1.6) 9(-5.95,-2.4) 10(-5.95,-3.2) 11(-5.95,-4) 23(5.95,-4) 24(5.95,-3.2) 25(5.95,-2.4) 26(5.95,-1.6) 27(5.95,-0.8) 28(5.95,0) 29(5.95,0.8) 30(5.95,1.6) 31(5.95,2.4) 32(5.95,3.2) 33(5.95,4)
  rect 0.5x1.9 smd: 12(-4,-5.95) 13(-3.2,-5.95) 14(-2.4,-5.95) 15(-1.6,-5.95) 16(-0.8,-5.95) 17(0,-5.95) 18(0.8,-5.95) 19(1.6,-5.95) 20(2.4,-5.95) 21(3.2,-5.95) 22(4,-5.95) 34(4,5.95) 35(3.2,5.95) 36(2.4,5.95) 37(1.6,5.95) 38(0.8,5.95) 39(0,5.95) 40(-0.8,5.95) 41(-1.6,5.95) 42(-2.4,5.95) 43(-3.2,5.95) 44(-4,5.95)
  silkscreen extent -6.07,-4.6 4.6,4.92
SCREW6-32 [mil] "6-32 screw"
  round 160 hole 140 paste-20 mask+30: 0(0,0)
  silkscreen extent -140,-140 140,140
"SMD _LED" [mm] "SMT LED; 2 Leads"
  rect 1.3x1.6 smd: 1(0.95,0) 2(-0.95,0)
  silkscreen extent -2.13,-1.15 2,1.15
"SMT 2x7 2mm HDR" [mm] "SMT dual-row 14-pin SMT header with posts, like Molex 87832-1420"
  round 1.1 hole 1: 0(-5,0) 0(5,0)
  rect 1x2.75 smd: 1(6,2.125) 2(6,-2.125) 3(4,2.125) 4(4,-2.125) 5(2,2.125) 6(2,-2.125) 7(0,2.125) 8(0,-2.125) 9(-2,2.125) 10(-2,-2.125) 11(-4,2.125) 12(-4,-2.125) 13(-6,2.125) 14(-6,-2.125)
  silkscreen extent -8,-4 8,4
SOT223-5/Simple [mil] "SOT-223 without large heatsink"
  rect 30x60 smd: 1(-100,0) 2(-50,0) 3(0,0) 4(50,0) 5(100,0)
  rect 100x140 smd: 3(0,196.85)
  silkscreen extent -140,60 140,200
SSO-G28/E4.3 [mm] "SSOP; 28 Leads; Body Width 5.3 mm; Pitch 0.65 mm"
  rect 0.45x1.7 smd: 1(-4.225,-3.4) 2(-3.575,-3.4) 3(-2.925,-3.4) 4(-2.275,-3.4) 5(-1.625,-3.4) 6(-0.975,-3.4) 7(-0.325,-3.4) 8(0.325,-3.4) 9(0.975,-3.4) 10(1.625,-3.4) 11(2.275,-3.4) 12(2.925,-3.4) 13(3.575,-3.4) 14(4.225,-3.4) 15(4.225,3.4) 16(3.575,3.4) 17(2.925,3.4) 18(2.275,3.4) 19(1.625,3.4) 20(0.975,3.4) 21(0.325,3.4) 22(-0.325,3.4) 23(-0.975,3.4) 24(-1.625,3.4) 25(-2.275,3.4) 26(-2.925,3.4) 27(-3.575,3.4) 28(-4.225,3.4)
  silkscreen extent -5.18,-3.52 5.18,2.15
STEWARD_1SR [mil]
  rect 124x136 smd: 1(-169,0) 2(169,0)
  silkscreen extent -263,-100 263,100
TSSO5x6-G16 [mm] "Shrink Small Outline; 16 Leads; Body Width 4.4 mm; Pitch 0.65 mm"
  rect 0.3x1.65 smd: 1(-2.275,-2.775) 2(-1.625,-2.775) 3(-0.975,-2.775) 4(-0.325,-2.775) 5(0.325,-2.775) 6(0.975,-2.775) 7(1.625,-2.775) 8(2.275,-2.775) 9(2.275,2.775) 10(1.625,2.775) 11(0.975,2.775) 12(0.325,2.775) 13(-0.325,2.775) 14(-0.975,2.775) 15(-1.625,2.775) 16(-2.275,2.775)
  silkscreen extent -3.1,-2.9 2.55,1.55
TSSO12x8-G48/X.3 [mm] "Shrink Small Outline; 48 Leads; Body Width 6.1 mm; Pitch 0.5 mm"
  rect 0.3x1.65 smd: 1(-5.75,-3.625) 2(-5.25,-3.625) 3(-4.75,-3.625) 4(-4.25,-3.625) 5(-3.75,-3.625) 6(-3.25,-3.625) 7(-2.75,-3.625) 8(-2.25,-3.625) 9(-1.75,-3.625) 10(-1.25,-3.625) 11(-0.75,-3.625) 12(-0.25,-3.625) 13(0.25,-3.625) 14(0.75,-3.625) 15(1.25,-3.625) 16(1.75,-3.625) 17(2.25,-3.625) 18(2.75,-3.625) 19(3.25,-3.625) 20(3.75,-3.625) 21(4.25,-3.625) 22(4.75,-3.625) 23(5.25,-3.625) 24(5.75,-3.625) 25(5.75,3.625) 26(5.25,3.625) 27(4.75,3.625) 28(4.25,3.625) 29(3.75,3.625) 30(3.25,3.625) 31(2.75,3.625) 32(2.25,3.625) 33(1.75,3.625) 34(1.25,3.625) 35(0.75,3.625) 36(0.25,3.625) 37(-0.25,3.625) 38(-0.75,3.625) 39(-1.25,3.625) 40(-1.75,3.625) 41(-2.25,3.625) 42(-2.75,3.625) 43(-3.25,3.625) 44(-3.75,3.625) 45(-4.25,3.625) 46(-4.75,3.625) 47(-5.25,3.625) 48(-5.75,3.625)
  silkscreen extent -6.57,-3.75 6.3,2.4
"Vertical BNC 227699-1" [mil] "AMP vertical BNC 227699-1"
  round 70 hole 52: 1(0,0) 2(250,250) 3(-250,250) 4(-250,-250) 5(250,-250)
  silkscreen extent -345,-345 345,345
"Xilinx FT256 BGA" [mm] "Xilinx BGA"
  round 0.45 smd mask+0.05: A1(-7.5,7.5) A2(-6.5,7.5) A3(-5.5,7.5) A4(-4.5,7.5) A5(-3.5,7.5) A6(-2.5,7.5) A7(-1.5,7.5) A8(-0.5,7.5) A9(0.5,7.5) A10(1.5,7.5) A11(2.5,7.5) A12(3.5,7.5) A13(4.5,7.5) A14(5.5,7.5) A15(6.5,7.5) A16(7.5,7.5) B1(-7.5,6.5) B2(-6.5,6.5) B3(-5.5,6.5) B4(-4.5,6.5) B5(-3.5,6.5) B6(-2.5,6.5) B7(-1.5,6.5) B8(-0.5,6.5) B9(0.5,6.5) B10(1.5,6.5) B11(2.5,6.5) B12(3.5,6.5) B13(4.5,6.5) B14(5.5,6.5) B15(6.5,6.5) B16(7.5,6.5) C1(-7.5,5.5) C2(-6.5,5.5) C3(-5.5,5.5) C4(-4.5,5.5) C5(-3.5,5.5) C6(-2.5,5.5) C7(-1.5,5.5) C8(-0.5,5.5) C9(0.5,5.5) C10(1.5,5.5) C11(2.5,5.5) C12(3.5,5.5) C13(4.5,5.5) C14(5.5,5.5) C15(6.5,5.5) C16(7.5,5.5) D1(-7.5,4.5) D2(-6.5,4.5) D3(-5.5,4.5) D4(-4.5,4.5) D5(-3.5,4.5) D6(-2.5,4.5) D7(-1.5,4.5) D8(-0.5,4.5) D9(0.5,4.5) D10(1.5,4.5) D11(2.5,4.5) D12(3.5,4.5) D13(4.5,4.5) D14(5.5,4.5) D15(6.5,4.5) D16(7.5,4.5) E1(-7.5,3.5) E2(-6.5,3.5) E3(-5.5,3.5) E4(-4.5,3.5) E5(-3.5,3.5) E6(-2.5,3.5) E7(-1.5,3.5) E8(-0.5,3.5) E9(0.5,3.5) E10(1.5,3.5) E11(2.5,3.5) E12(3.5,3.5) E13(4.5,3.5) E14(5.5,3.5) E15(6.5,3.5) E16(7.5,3.5) F1(-7.5,2.5) F2(-6.5,2.5) F3(-5.5,2.5) F4(-4.5,2.5) F5(-3.5,2.5) F6(-2.5,2.5) F7(-1.5,2.5) F8(-0.5,2.5) F9(0.5,2.5) F10(1.5,2.5) F11(2.5,2.5) F12(3.5,2.5) F13(4.5,2.5) F14(5.5,2.5) F15(6.5,2.5) F16(7.5,2.5) G1(-7.5,1.5) G2(-6.5,1.5) G3(-5.5,1.5) G4(-4.5,1.5) G5(-3.5,1.5) G6(-2.5,1.5) G7(-1.5,1.5) G8(-0.5,1.5) G9(0.5,1.5) G10(1.5,1.5) G11(2.5,1.5) G12(3.5,1.5) G13(4.5,1.5) G14(5.5,1.5) G15(6.5,1.5) G16(7.5,1.5) H1(-7.5,0.5) H2(-6.5,0.5) H3(-5.5,0.5) H4(-4.5,0.5) H5(-3.5,0.5) H6(-2.5,0.5) H7(-1.5,0.5) H8(-0.5,0.5) H9(0.5,0.5) H10(1.5,0.5) H11(2.5,0.5) H12(3.5,0.5) H13(4.5,0.5) H14(5.5,0.5) H15(6.5,0.5) H16(7.5,0.5) J1(-7.5,-0.5) J2(-6.5,-0.5) J3(-5.5,-0.5) J4(-4.5,-0.5) J5(-3.5,-0.5) J6(-2.5,-0.5) J7(-1.5,-0.5) J8(-0.5,-0.5) J9(0.5,-0.5) J10(1.5,-0.5) J11(2.5,-0.5) J12(3.5,-0.5) J13(4.5,-0.5) J14(5.5,-0.5) J15(6.5,-0.5) J16(7.5,-0.5) K1(-7.5,-1.5) K2(-6.5,-1.5) K3(-5.5,-1.5) K4(-4.5,-1.5) K5(-3.5,-1.5) K6(-2.5,-1.5) K7(-1.5,-1.5) K8(-0.5,-1.5) K9(0.5,-1.5) K10(1.5,-1.5) K11(2.5,-1.5) K12(3.5,-1.5) K13(4.5,-1.5) K14(5.5,-1.5) K15(6.5,-1.5) K16(7.5,-1.5) L1(-7.5,-2.5) L2(-6.5,-2.5) L3(-5.5,-2.5) L4(-4.5,-2.5) L5(-3.5,-2.5) L6(-2.5,-2.5) L7(-1.5,-2.5) L8(-0.5,-2.5) L9(0.5,-2.5) L10(1.5,-2.5) L11(2.5,-2.5) L12(3.5,-2.5) L13(4.5,-2.5) L14(5.5,-2.5) L15(6.5,-2.5) L16(7.5,-2.5) M1(-7.5,-3.5) M2(-6.5,-3.5) M3(-5.5,-3.5) M4(-4.5,-3.5) M5(-3.5,-3.5) M6(-2.5,-3.5) M7(-1.5,-3.5) M8(-0.5,-3.5) M9(0.5,-3.5) M10(1.5,-3.5) M11(2.5,-3.5) M12(3.5,-3.5) M13(4.5,-3.5) M14(5.5,-3.5) M15(6.5,-3.5) M16(7.5,-3.5) N1(-7.5,-4.5) N2(-6.5,-4.5) N3(-5.5,-4.5) N4(-4.5,-4.5) N5(-3.5,-4.5) N6(-2.5,-4.5) N7(-1.5,-4.5) N8(-0.5,-4.5) N9(0.5,-4.5) N10(1.5,-4.5) N11(2.5,-4.5) N12(3.5,-4.5) N13(4.5,-4.5) N14(5.5,-4.5) N15(6.5,-4.5) N16(7.5,-4.5) P1(-7.5,-5.5) P2(-6.5,-5.5) P3(-5.5,-5.5) P4(-4.5,-5.5) P5(-3.5,-5.5) P6(-2.5,-5.5) P7(-1.5,-5.5) P8(-0.5,-5.5) P9(0.5,-5.5) P10(1.5,-5.5) P11(2.5,-5.5) P12(3.5,-5.5) P13(4.5,-5.5) P14(5.5,-5.5) P15(6.5,-5.5) P16(7.5,-5.5) R1(-7.5,-6.5) R2(-6.5,-6.5) R3(-5.5,-6.5) R4(-4.5,-6.5) R5(-3.5,-6.5) R6(-2.5,-6.5) R7(-1.5,-6.5) R8(-0.5,-6.5) R9(0.5,-6.5) R10(1.5,-6.5) R11(2.5,-6.5) R12(3.5,-6.5) R13(4.5,-6.5) R14(5.5,-6.5) R15(6.5,-6.5) R16(7.5,-6.5) T1(-7.5,-7.5) T2(-6.5,-7.5) T3(-5.5,-7.5) T4(-4.5,-7.5) T5(-3.5,-7.5) T6(-2.5,-7.5) T7(-1.5,-7.5) T8(-0.5,-7.5) T9(0.5,-7.5) T10(1.5,-7.5) T11(2.5,-7.5) T12(3.5,-7.5) T13(4.5,-7.5) T14(5.5,-7.5) T15(6.5,-7.5) T16(7.5,-7.5)
  silkscreen extent -9.27,-8.5 8.5,8.5

## Part data
C1 C2 C3 C4.A1 C4.A2 C5.A1 C5.A2 C6.A1 C6.A2 C7.A1 C7.A2 C8.A1 C8.A2 C9.A1 C9.A2 C10.A1 C10.A2 C11.A1 C11.A2 C12.A1 C12.A2 C13.A1 C13.A2 C14.A1 C14.A2 C15.A1 C15.A2 C16.A1 C16.A2 C17.A1 C17.A2 C18.A1 C18.A2 C19.A1 C19.A2 C20 C21.A1 C21.A2 C22 C23 C24 C25 C26 C27 C28 C29 C30 C31 C32 C33 C34 C35 C36 C37 C38 C39 C40 C41 C43 C44 C45 C46 C47 C48 C51 C52 C53 C55 C56 C57 C58 C59 C61 C62 C64 C65 C73 C74 C75 C76 C78 C80 C88 C98: "Standard Capacitor"
C71 C77 C99: "Capacitor"
DS1 DS2: "Typical BLUE SiC LED"
FID1 FID2 FID3 FID4 FID5 FID6 FID7 FID10: "Fiducial"
J1: library part SATA-7
JP1 JP2 JP3 JP4 JP5 JP6 JP7 JP8 P17: "Header, 8-Pin, Dual row"
JP9: "Header, 7-Pin, Dual row"
L1: library part Inductor, "Inductor"
O1: "ECS SMD Oscillator, ECS-3953M"
P1.A1 P1.A2 P2.A1 P2.A2 P3.A1 P3.A2 P4.A1 P4.A2 P5.A1 P5.A2 P6.A1 P6.A2 P7.A1 P7.A2 P8.A1 P8.A2: "BNC Elbow Connector"
R1 R3 R5 R11 R12 R13 R14 R15 R16: library part RESISTOR, "Standard Passive Resistor"
R6 R7: library part Res1, "Resistor"
S1 S2 S3 S4 S5 S6: library part MNTSCREW
U1: library part XC3S200-FT256, "Xilinx Spartan-3 FPGA"
U2 U3 U4: library part TPS795XX, "TI Ultra-low-noise LDO"
U5.A1 U5.A2 U8.A1 U8.A2: "Quad 18 Mhz, Low Noise, Rail-to-Rail CMOS Op-Amp"
U6.A1 U6.A2 U9.A1 U9.A2: "TI 16-bit quad chan Voltage Output DAC"
U7.A1 U7.A2: library part LTC1859, "LTC 8-channel 12, 14, 16 100ksps ADC"
U10 U11 U16 U17: "16-bit bus transceiver with 3-state outputs"
U22: "30-66 MHz 10-Bit Bus LVDS Deserializer"
U23: library part XC2C64A-5VQ44C

## Via types
v1: diameter 20, hole 10, Top Layer to Bottom Layer, 322 vias
v2: diameter 20, hole 10, Top Layer to Bottom Layer, tented top, 122 vias
v3: diameter 40, hole 20, Top Layer to Bottom Layer, 57 vias
v4: diameter 40, hole 25, Top Layer to Bottom Layer, 2 vias

## Nets (pads, with @x,y where several pads share a name; then routed paths per layer and width w, separated by ;. In a path a pad name is that pad's centre, name@x,y a point inside that pad or via, vN(x,y) a via of type N, cw(c..) or ccw(c..) an arc to the next point about the centre after c; other vN are vias at no path point)
+1.2VCC: C37.1 C38.1 C39.1 C40.1 C41.1 C98.1 C99.2 U1.D4 U1.D13 U1.E5 U1.E12 U1.M5 U1.M12 U1.N4 U1.N13 U4.4 U4.5 | length 840.1
  Top Layer w6: v2(5354.33,4842.52) U1.N4@5374.02,4862.2 ; v2(5393.7,4881.89) U1.M5@5413.39,4901.57 ; U1.M12@5688.98,4901.57 v2(5708.66,4881.89) ; U1.E12@5688.98,5177.17 v2(5708.66,5196.85) ; U1.N13@5728.35,4862.2 v2(5748.03,4842.52) ; U1.D13@5728.35,5216.54 v2(5748.03,5236.22)
  Top Layer w8: v2(5354.33,5236.22) U1.D4@5374.02,5216.54 ; v2(5393.7,5196.85) U1.E5@5413.39,5177.17
  Top Layer w16: v3(5728.35,3543.31) C98.1@5728.35,3612.2 ; v3(5752.6,3460) U4.5@5810,3460 ; U4.5@5807.09,3464.57 5807.09,3513.78 5816.93,3523.62 v3(5866.14,3523.62) ; U4.4@5860,3460 5860,3517.48 5885.83,3543.31 C99.2@5885.83,3572.83
  Bottom Layer w6: v2@5360,4848.19 C40.1@5360,4886.54
  Bottom Layer w12: C37.1@5320,5256.16 5339.94,5236.22 v2(5354.33,5236.22) ; v2(5748.03,4842.52) 5750.55,4840 C39.1@5786.16,4840 ; v2(5748.03,5236.22) 5757.97,5246.16 C38.1@5790,5246.16 5799.62,5236.54 C41.1@5875,5236.54
+1.8VCC: C1.1 C71.2 U2.4 U23.15 | length 332.2
  Top Layer w8: v1(5275.59,7116.14) C71.2@5344.49,7116.14 ; U2.4@5560,7150 v1(5560,7203.7)
  Top Layer w10: U23.15@4705.75,6912.99 v1(4760.24,6912.99)
  Top Layer w16: v3(5469.45,7247.09) C1.1@5469.45,7330 ; v3(5560,7077.8) U2.4@5560,7150
+2.5VCC: C22.1 C24.1 C25.1 C27.1 C30.1 C32.1 C33.1 C35.1 C43.1 C44.1 C45.1 C48.1 C51.1 C52.1 C53.1 C55.1 C75.1 C77.2 U1.A6 U1.A11 U1.E8 U1.F1 U1.F7 U1.F8 U1.F16 U1.G6 U1.H5 U1.H6 U1.J5 U1.J6 U1.K6 U1.L1 U1.L7 U1.L8 U1.L16 U1.M8 U1.T6 U1.T11 U3.4 U10.1 U10.24 U10.31 U10.42 U11.1 U11.24 U11.31 U11.42 U16.1 U16.24 U16.31 U16.42 U17.1 U17.24 U17.31 U17.42 | length 2413.1
  Top Layer w6: v2(5216.54,5137.8) U1.F1@5255.91,5137.8 ; v2(5233.51,4940.94) U1.L1@5255.91,4940.94 ; v2(5393.7,5000) U1.J5@5413.39,5019.69 ; v2(5393.7,5078.74) U1.H5@5413.39,5059.06 ; v2(5433.07,4960.63) U1.K6@5452.76,4980.31 ; v2(5433.07,5000) U1.J6@5452.76,5019.69 ; v2(5433.07,5078.74) U1.H6@5452.76,5059.06 ; v2(5433.07,5118.11) U1.G6@5452.76,5098.43 ; v2(5452.76,4714.57) U1.T6@5452.76,4744.09 ; U1.A6@5452.76,5334.65 v2(5452.76,5364.17) ; v2(5472.44,4921.26) U1.L7@5492.13,4940.94 ; v2(5472.44,5157.48) U1.F7@5492.13,5137.8 ; v2(5511.81,4921.26) U1.L8@5531.5,4940.94 ; v2(5511.81,5157.48) U1.F8@5531.5,5137.8 ; U1.M8@5531.5,4901.57 v2(5551.18,4881.89) ; U1.E8@5531.5,5177.17 v2(5551.18,5196.85) ; v2(5649.61,4714.57) U1.T11@5649.61,4744.09 ; U1.A11@5649.61,5334.65 v2(5649.61,5364.17) ; U1.F16@5846.46,5137.8 5866.68,5137.8 v2(5876.27,5128.2)
  Top Layer w8: U1.L16@5846.46,4940.94 v2(5875.98,4940.94)
  Top Layer w10: U16.24@4732.28,3623.62 v1(4786.1,3623.62) ; U16.1@4732.28,4076.38 v1(4786.1,4076.38) ; U10.24@4732.28,4423.62 v1(4786.1,4423.62) ; U10.1@4732.28,4876.38 v1(4786.1,4876.38) ; U17.24@4732.28,5223.62 v1(4783.46,5223.62) ; U17.1@4732.28,5676.38 v1(4783.46,5676.38) ; U11.24@4732.28,6023.62 v1(4783.46,6023.62) ; U11.1@4732.28,6476.38 v1(4783.46,6476.38) ; v1(4962.2,3741.73) U16.31@5017.72,3741.73 ; v1(4962.2,3958.27) U16.42@5017.72,3958.27 ; v1(4963.9,4541.73) U10.31@5017.72,4541.73 ; v1(4963.9,4758.27) U10.42@5017.72,4758.27 ; v1(4963.9,5341.73) U17.31@5017.72,5341.73 ; v1(4963.9,5558.27) U17.42@5017.72,5558.27 ; v1(4966.54,6141.73) U11.31@5017.72,6141.73 ; v1(4966.54,6358.27) U11.42@5017.72,6358.27 ; C25.1@5214.88,6500 v1(5214.88,6543.62)
  Top Layer w16: v1(4990.16,4133.86) C30.1@4990.16,4183.07 ; v1(5000,4940.94) C22.1@5000,4980.31 ; v1(5005.12,5753.15) C33.1@5005.12,5790 ; C75.1@5020.55,3330 v3(5105.04,3330) ; C77.2@5196.85,3582.68 5196.85,3572.83 5260,3509.68 U3.4@5260,3460
  Bottom Layer w12: v2(5233.51,4940.94) 5259.41,4940.94 C52.1@5275,4956.54 ; v2(5393.7,5000) 5401.16,5007.46 C44.1@5401.16,5040 ; v2(5452.76,4714.57) C53.1@5492.85,4714.57 ; C43.1@5493.84,4885 5511.81,4902.97 v2(5511.81,4921.26) ; v2(5511.81,5157.48) 5538.11,5157.48 C45.1@5555,5140.59 ; v2(5551.18,4881.89) 5590,4843.07 C48.1@5590,4835.59 ; v2(5649.61,4714.57) 5668.28,4733.24 C55.1@5668.28,4765
  Bottom Layer w16: v1(4962.2,3741.73) C32.1@5010,3741.72 ; v1(4963.9,4541.73) 4969.1,4536.54 C24.1@5010,4536.54 ; v1(4963.9,5341.73) C35.1@5013.45,5341.73 ; v1(4966.54,6141.73) C27.1@5008.27,6141.73 ; C51.1@5206.54,5090 5206.54,5127.8 v2(5216.54,5137.8)
  other v3: 5246.06,3523.62
+5VCC: C10.A1.1 C10.A2.1 C12.A1.1 C12.A2.1 C20.1 C23.1 C26.1 C28.1 C29.1 C31.1 C34.1 C36.1 L1.1 P17.2 P17.4 P17.6 U7.A1.20 U7.A2.20 U10.7 U10.18 U11.7 U11.18 U16.7 U16.18 U17.7 U17.18 | length 2012.4
  Top Layer w10: U16.18@4732.28,3741.73 v1(4786.1,3741.73) ; U16.7@4732.28,3958.27 v1(4786.1,3958.27) ; U10.18@4732.28,4541.73 v1(4786.1,4541.73) ; U10.7@4732.28,4758.27 v1(4786.1,4758.27) ; U17.18@4732.28,5341.73 v1(4783.46,5341.73) ; U17.7@4732.28,5558.27 v1(4783.46,5558.27) ; U11.18@4732.28,6141.73 v1(4783.46,6141.73) ; U11.7@4732.28,6358.27 v1(4783.46,6358.27) ; v1(5875.98,4547.24) 5878.11,4545.12 C10.A2.1@5930,4545.12 5930,4610 6000,4680 v1(6080,4680) 6087.36,4672.64 U7.A2.20@6150,4672.64 ; C10.A1.1@6030.12,6325 6030.12,6296.99 6052.83,6274.27 v1(6077.44,6274.27) 6082.36,6269.35 U7.A1.20@6151.25,6269.35 ; 6082.36,4669.35 U7.A2.20@6151.25,4669.35
  Top Layer w16: C29.1@4832.68,3513.78 v1(4832.68,3553.15) ; C34.1@4832.68,5088.58 v1(4832.68,5137.8) ; C26.1@4832.68,5915.35 v1@4832.68,5944.88 ; C20.1@4842.52,4301.18 v1(4842.52,4340.55)
  Top Layer w20: v3(3570,7015) P17.6@3570,7132.6 ; v3(3670,7015) P17.4@3670,7132.6 ; v3(3770,7015) P17.2@3770,7132.6 ; v3(5981,7093.26) v3(5981,7299.96)
  Bottom Layer w10: v1(6077.44,6274.27) 6077.44,6317.44 C12.A1.1@6080,6320 ; v1(6080,4680) C12.A2.1@6080,4720
  Bottom Layer w16: C36.1@4730,5341.72 v1(4783.46,5341.73) ; C31.1@4740,3741.72 v1(4786.1,3741.73) ; C23.1@4740,4541.72 v1(4786.1,4541.73) ; C28.1@4740,6143.46 v1@4781.73,6143.46
  other v1: 4832.68,5954.72
+12VCC: P17.8 | length 117.6
  Top Layer w20: v3(3470,7015) P17.8@3470,7132.6
ADIO0.A1: P1.A1.1 U5.A1.3 U6.A1.1 | length 3651.5
  Top Layer w6: v1(6303.8,6520.32) 6313.82,6530.34 U5.A1.3@6313.82,6562.72
  Top Layer w8: U6.A1.1@6407.14,6859.87 6461.27,6859.87 v1(6480.96,6840.19)
  Top Layer w16: v1(6480.96,6840.19) 6480.96,6826.13 6806.45,6500.64 9250.64,6500.64 P1.A1.1@9400,6650
  Mid-Layer 1 w12: v1(6303.8,6520.32) 6303.8,6549.85 6343.17,6589.22 6343.17,6638.43 6421.9,6717.16 6421.9,6781.14 v1(6480.96,6840.19)
ADIO0.A2: P1.A2.1 U5.A2.3 U6.A2.1 | length 3608.7
  Top Layer w6: v1(6303.8,4920.32) 6313.82,4930.34 U5.A2.3@6313.82,4962.72
  Top Layer w12: U6.A2.1@6409.25,5210.43 6486.11,5210.43 v1@6483.27,5213.27 ; P1.A2.1@9402.88,5047.12 P1.A2.1@9408.95,5053.19
  Top Layer w16: v1(6480,5210) 6789.36,4900.64 9250.64,4900.64 P1.A2.1@9400,5050
  Mid-Layer 1 w12: v1(6303.8,4920.32) 6303.8,4949.85 6343.17,4989.22 6343.17,5038.43 6421.9,5117.16 6421.9,5151.9 v1(6480,5210)
ADIO1.A1: P2.A1.1 U5.A1.5 U6.A1.2 | length 2855.7
  Top Layer w6: U5.A1.5@6353.19,6562.72 6353.19,6534.91 v1@6362.85,6525.25
  Top Layer w8: U6.A1.2@6407.14,6884.48 v1(6480.96,6884.48)
  Top Layer w16: v1(6480.96,6884.48) 6820.16,6545.28 8495.28,6545.28 P2.A1.1@8600,6650
  Mid-Layer 1 w12: v1(6362.85,6520.32) 6510.48,6667.95 6510.48,6854.95 v1(6480.96,6884.48)
ADIO1.A2: P2.A2.1 U5.A2.5 U6.A2.2 | length 2797.8
  Top Layer w6: U5.A2.5@6353.19,4962.72 6353.19,4934.91 v1@6362.85,4925.25
  Top Layer w12: U6.A2.2@6409.25,5236.02 6471.02,5236.02
  Top Layer w16: v1(6480,5245) 6526.65,5245 6821.8,4949.85 8512.84,4949.85 P2.A2.1@8612.2,5049.21
  Mid-Layer 1 w12: v1(6362.85,4920.32) 6510.48,5067.95 6510,5215 ; v1(6480,5245) 6510.48,5214.52
ADIO2.A1: P3.A1.1 U5.A1.12 U6.A1.7 | length 1967
  Top Layer w8: U5.A1.12@6353.01,6672.88 6353.01,6692.56 v1(6377.62,6717.16) ; U6.A1.7@6407.14,7012.43 6466.19,7012.43 v1(6480.96,6997.66)
  Top Layer w16: v1(6480.96,6997.66) 6884.48,6594.14 7744.14,6594.14 P3.A1.1@7800,6650
  Mid-Layer 1 w12: v1(6377.62,6717.16) 6377.62,6894.32 v1(6480.96,6997.66)
ADIO2.A2: P3.A2.1 U5.A2.12 U6.A2.7 | length 1940.2
  Top Layer w8: U5.A2.12@6353.01,5074.92 6353.01,5092.56 v1(6377.62,5117.16)
  Top Layer w12: U6.A2.7@6409.25,5363.98 v1@6510,5363.98
  Top Layer w16: v1(6510,5365) 6880.86,4994.14 7744.14,4994.14 P3.A2.1@7800,5050
  Mid-Layer 1 w12: v1(6377.62,5117.16) 6377.62,5262.62 6480,5365 v1(6510,5365)
ADIO3.A1: P4.A1.1 U5.A1.14 U6.A1.8 | length 1199.3
  Top Layer w8: v1(6298.88,6717.16) 6313.64,6702.4 U5.A1.14@6313.64,6672.88 ; U6.A1.8@6409.25,7039.57 v1(6478.42,7039.57)
  Top Layer w16: v1(6478.42,7039.57) 6513.58,7039.57 6903.15,6650 P4.A1.1@7000,6650
  Mid-Layer 1 w12: v1(6298.88,6717.16) 6348.09,6766.38 6348.09,6909.24 v1(6478.42,7039.57)
ADIO3.A2: P4.A2.1 U5.A2.14 U6.A2.8 | length 1150.8
  Top Layer w8: v1(6298.88,5117.16) 6313.64,5102.4 U5.A2.14@6313.64,5074.92
  Top Layer w12: U6.A2.8@6409.25,5389.57 v1@6465,5389.57
  Top Layer w16: v1(6465,5390) 6568.66,5390 6908.66,5050 P4.A2.1@7000,5050
  Mid-Layer 1 w12: v1(6298.88,5117.16) 6348.09,5166.38 6348.09,5298.09 6440,5390 6479.57,5390
ADIO4.A1: P5.A1.1 U8.A1.3 U9.A1.1 | length 3625.6
  Top Layer w8: v1@6293.96,5778.87 6293.96,5777.25 v1(6298.88,5772.33) ; v1@6295.57,5778.87 6295.57,5801.28 6301.26,5806.97 U8.A1.3@6301.26,5827.8
  Top Layer w10: U9.A1.1@6409.25,5485.43 6474.55,5485.43 v1(6495.72,5506.6)
  Top Layer w16: v1(6495.72,5506.6) 6535.09,5506.6 6692.42,5663.93 9221.81,5663.93 9400,5842.12 P5.A1.1@9400,5850
  Mid-Layer 1 w12: v1(6298.88,5772.33) 6298.88,5580.41 6372.69,5506.6 v1(6495.72,5506.6)
ADIO4.A2: P5.A2.1 U8.A2.3 U9.A2.1 | length 3625.6
  Top Layer w8: v1@6293.96,4178.87 6293.96,4177.25 v1(6298.88,4172.33) ; v1@6295.57,4178.87 6295.57,4201.28 6301.26,4206.97 U8.A2.3@6301.26,4227.8
  Top Layer w10: U9.A2.1@6409.25,3885.43 6474.55,3885.43 v1(6495.72,3906.6)
  Top Layer w16: v1(6495.72,3906.6) 6535.09,3906.6 6692.42,4063.93 9221.81,4063.93 9400,4242.12 P5.A2.1@9400,4250
  Mid-Layer 1 w12: v1(6298.88,4172.33) 6298.88,3980.41 6372.69,3906.6 v1(6495.72,3906.6)
ADIO5.A1: P6.A1.1 U8.A1.5 U9.A1.2 | length 2740.8
  Top Layer w8: 6340.63,5794.56 U8.A1.5@6340.63,5827.8
  Top Layer w10: U9.A1.2@6409.25,5511.52 6456.35,5511.52 v1(6480.96,5536.12)
  Top Layer w16: v1(6480.96,5536.12) 6672.88,5728.04 8478.04,5728.04 P6.A1.1@8600,5850
  Mid-Layer 1 w12: v1(6348.09,5787.1) 6357.93,5777.25 6357.93,5609.94 6431.75,5536.12 v1(6480.96,5536.12) ; 6357.93,5728.04 v1(6387.46,5698.52)
ADIO5.A2: P6.A2.1 U8.A2.5 U9.A2.2 | length 2740.8
  Top Layer w8: 6340.63,4194.56 U8.A2.5@6340.63,4227.8
  Top Layer w10: U9.A2.2@6409.25,3911.52 6456.35,3911.52 v1(6480.96,3936.12)
  Top Layer w16: v1(6480.96,3936.12) 6672.88,4128.04 8478.04,4128.04 P6.A2.1@8600,4250
  Mid-Layer 1 w12: v1(6348.09,4187.1) 6357.93,4177.25 6357.93,4009.94 6431.75,3936.12 v1(6480.96,3936.12) ; 6357.93,4128.04 v1(6387.46,4098.52)